# Altium PCB riglab_dynamic_scales_wifi_3ch .PcbDoc (part 1 of 3)
Units mm, origin at the board's own origin, x right, y up, seen from the top; angles counter-clockwise.
Board outline 130 x 80 mm, 4 copper layers (Top Layer, POWER, GND, Bottom Layer 1), stack 1.729 mm thick; 252 components, 202 nets, 899 pads, 104 vias.
Unrouted connection lines stored in the file: 235.
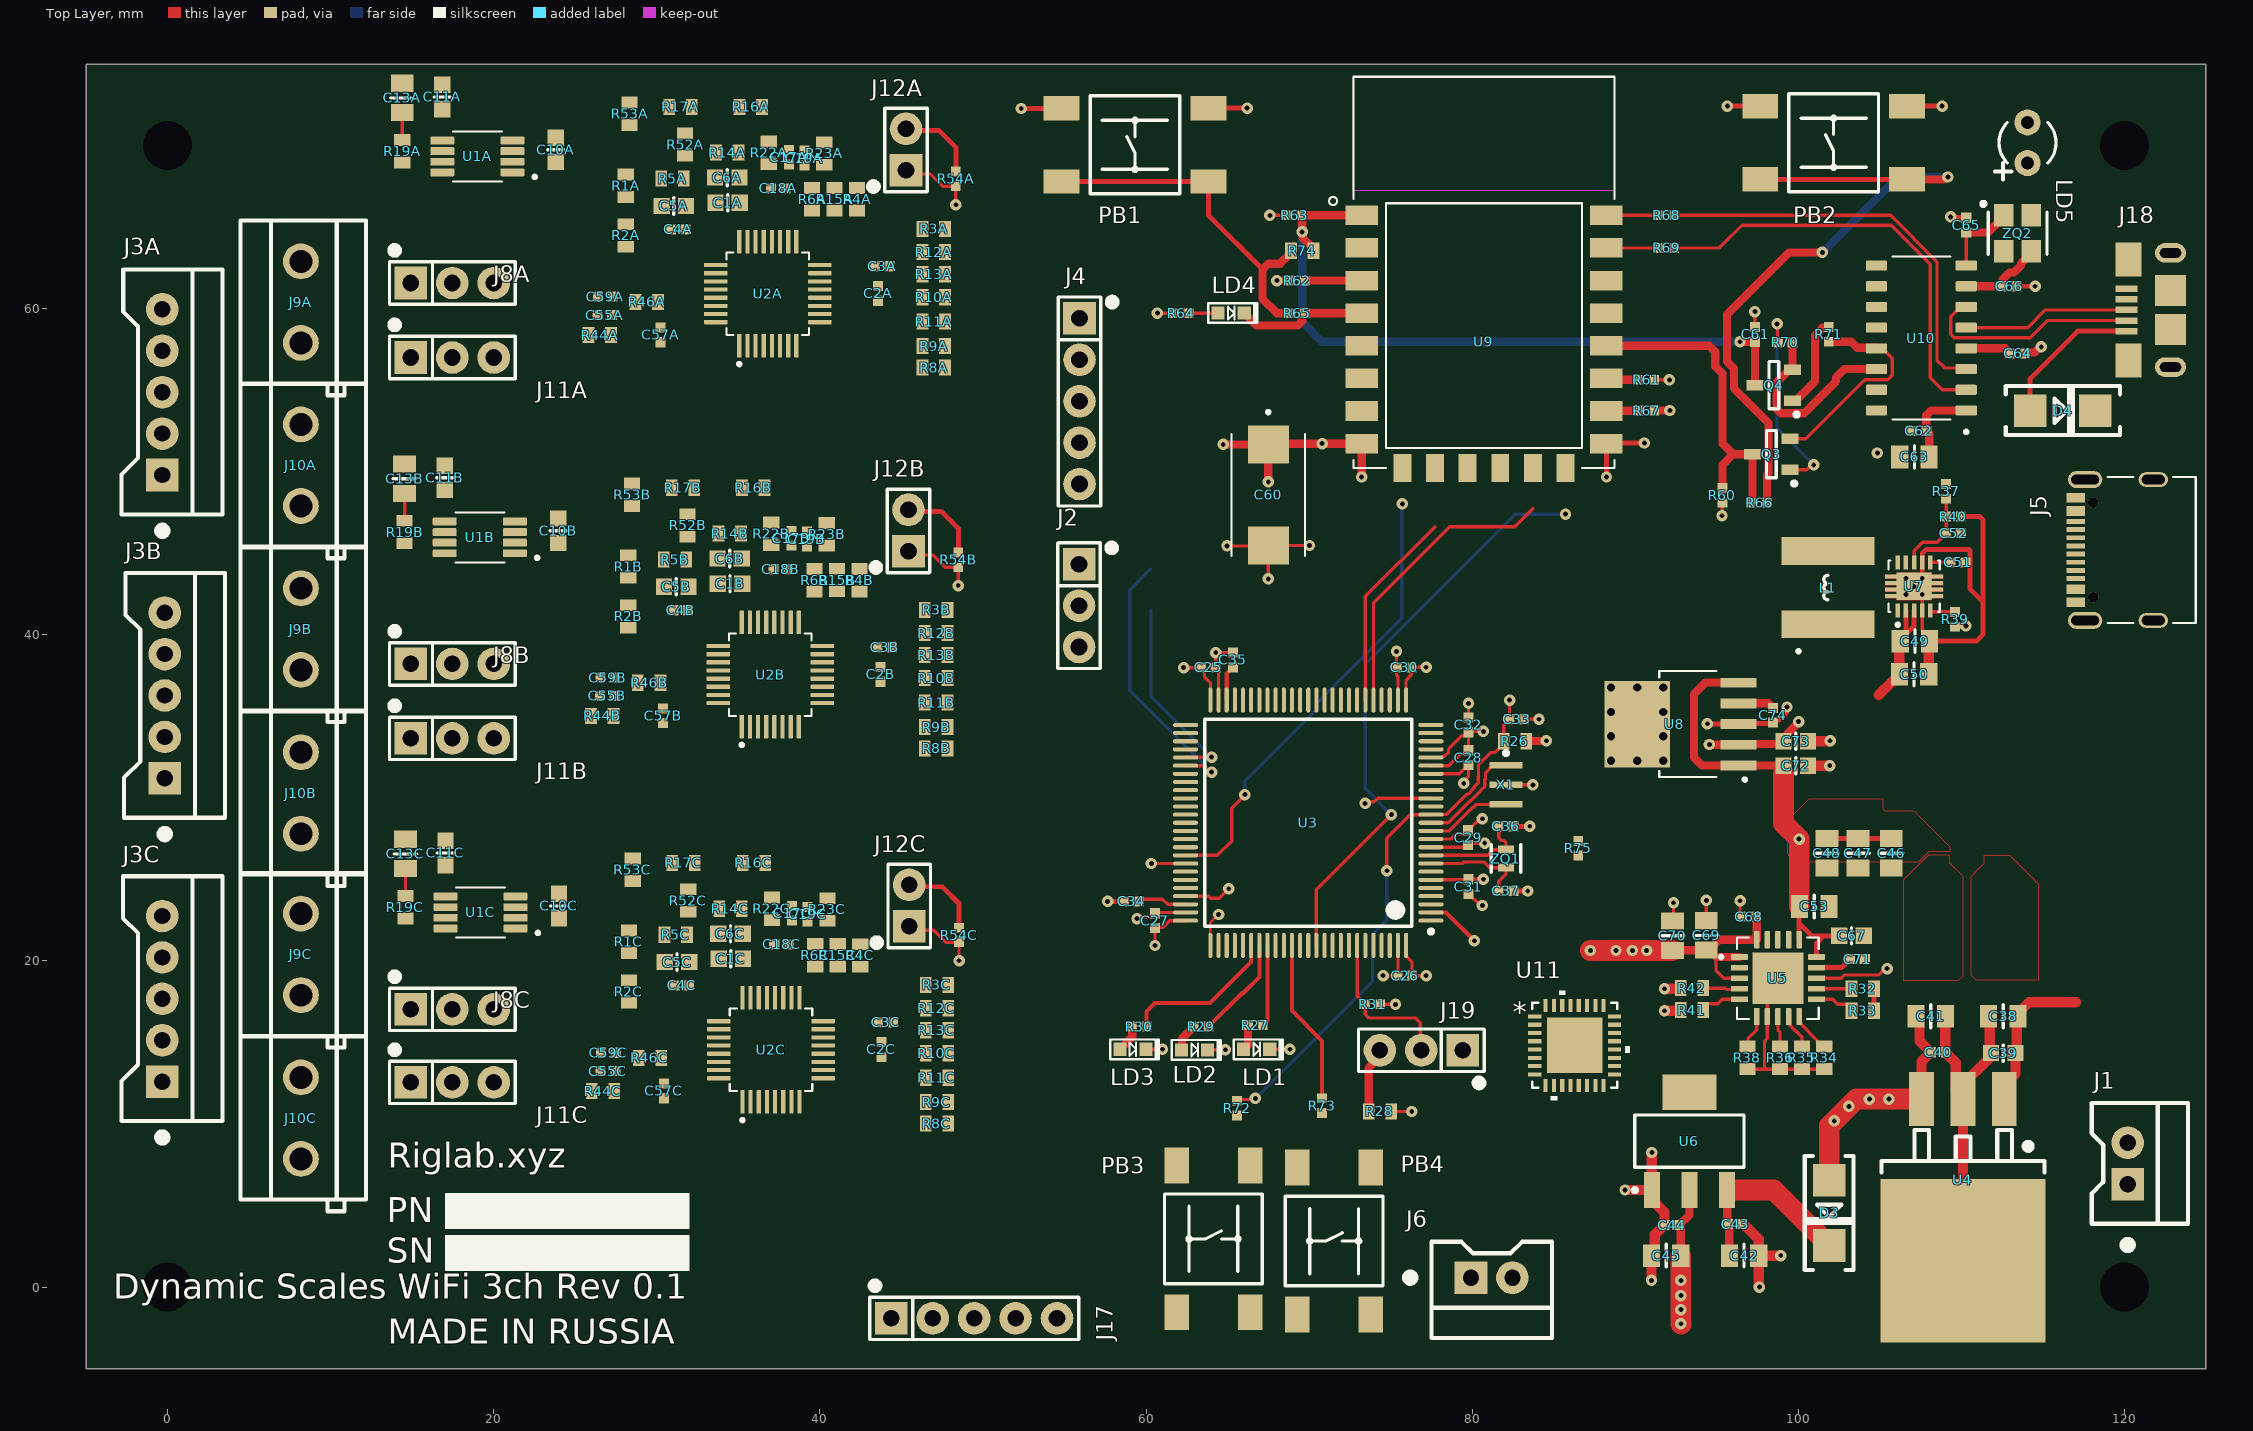
[diagram p0: Top Layer view]
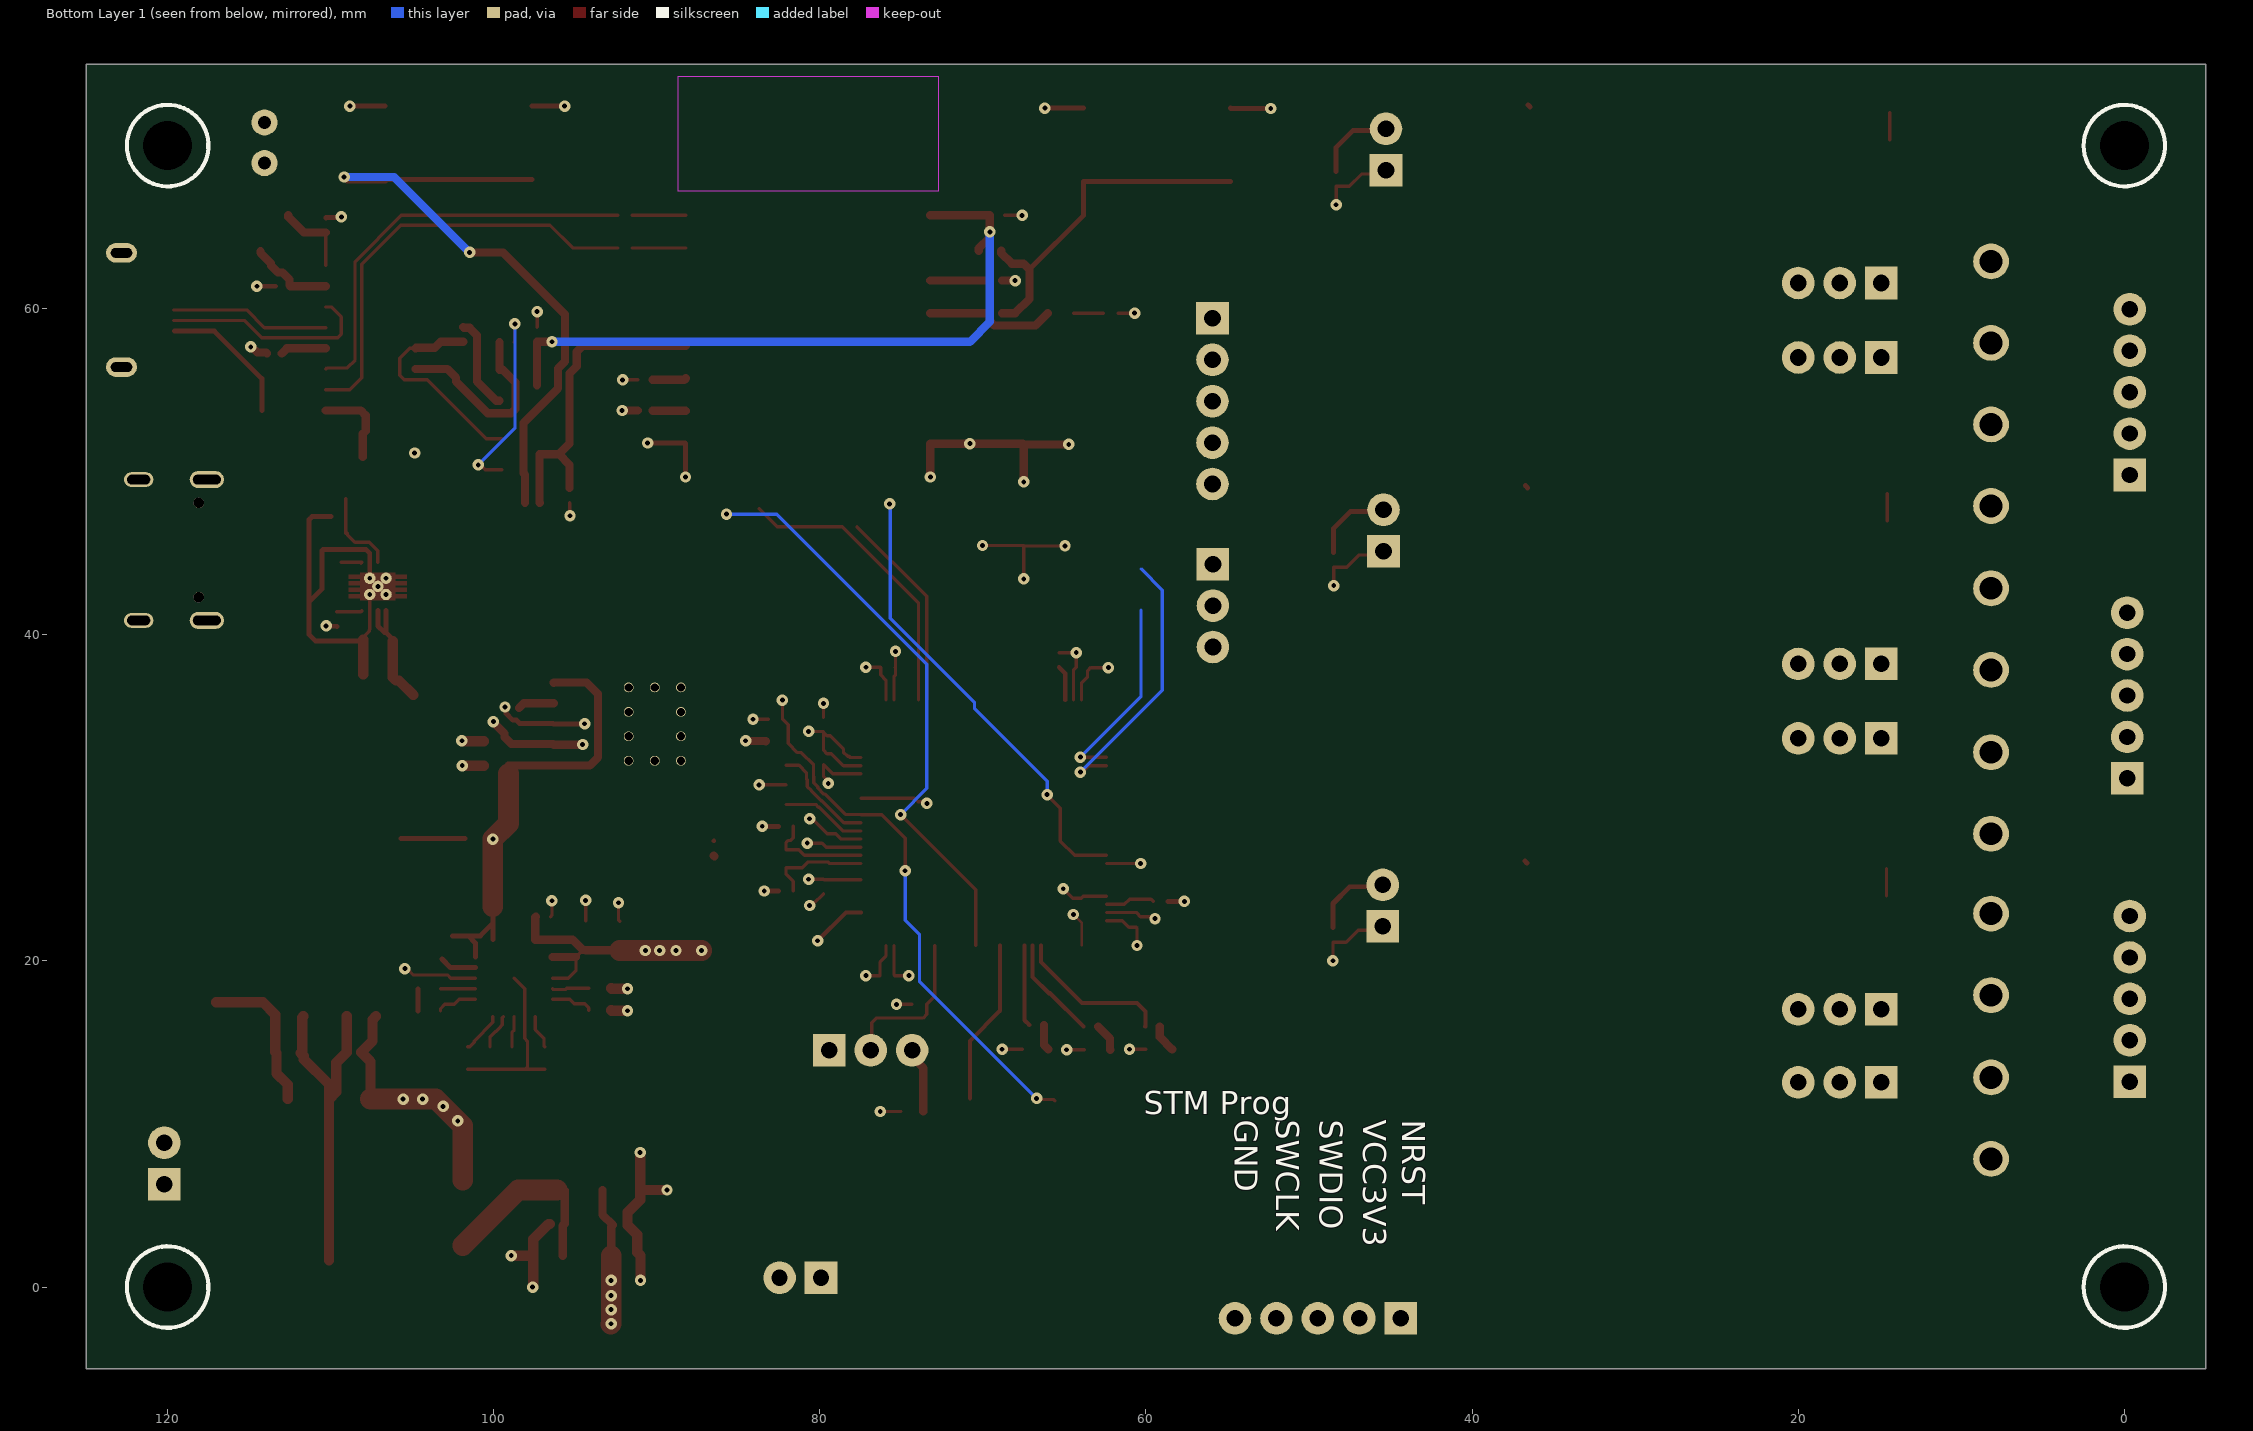
[diagram p1: Bottom Layer 1 view, seen from below]
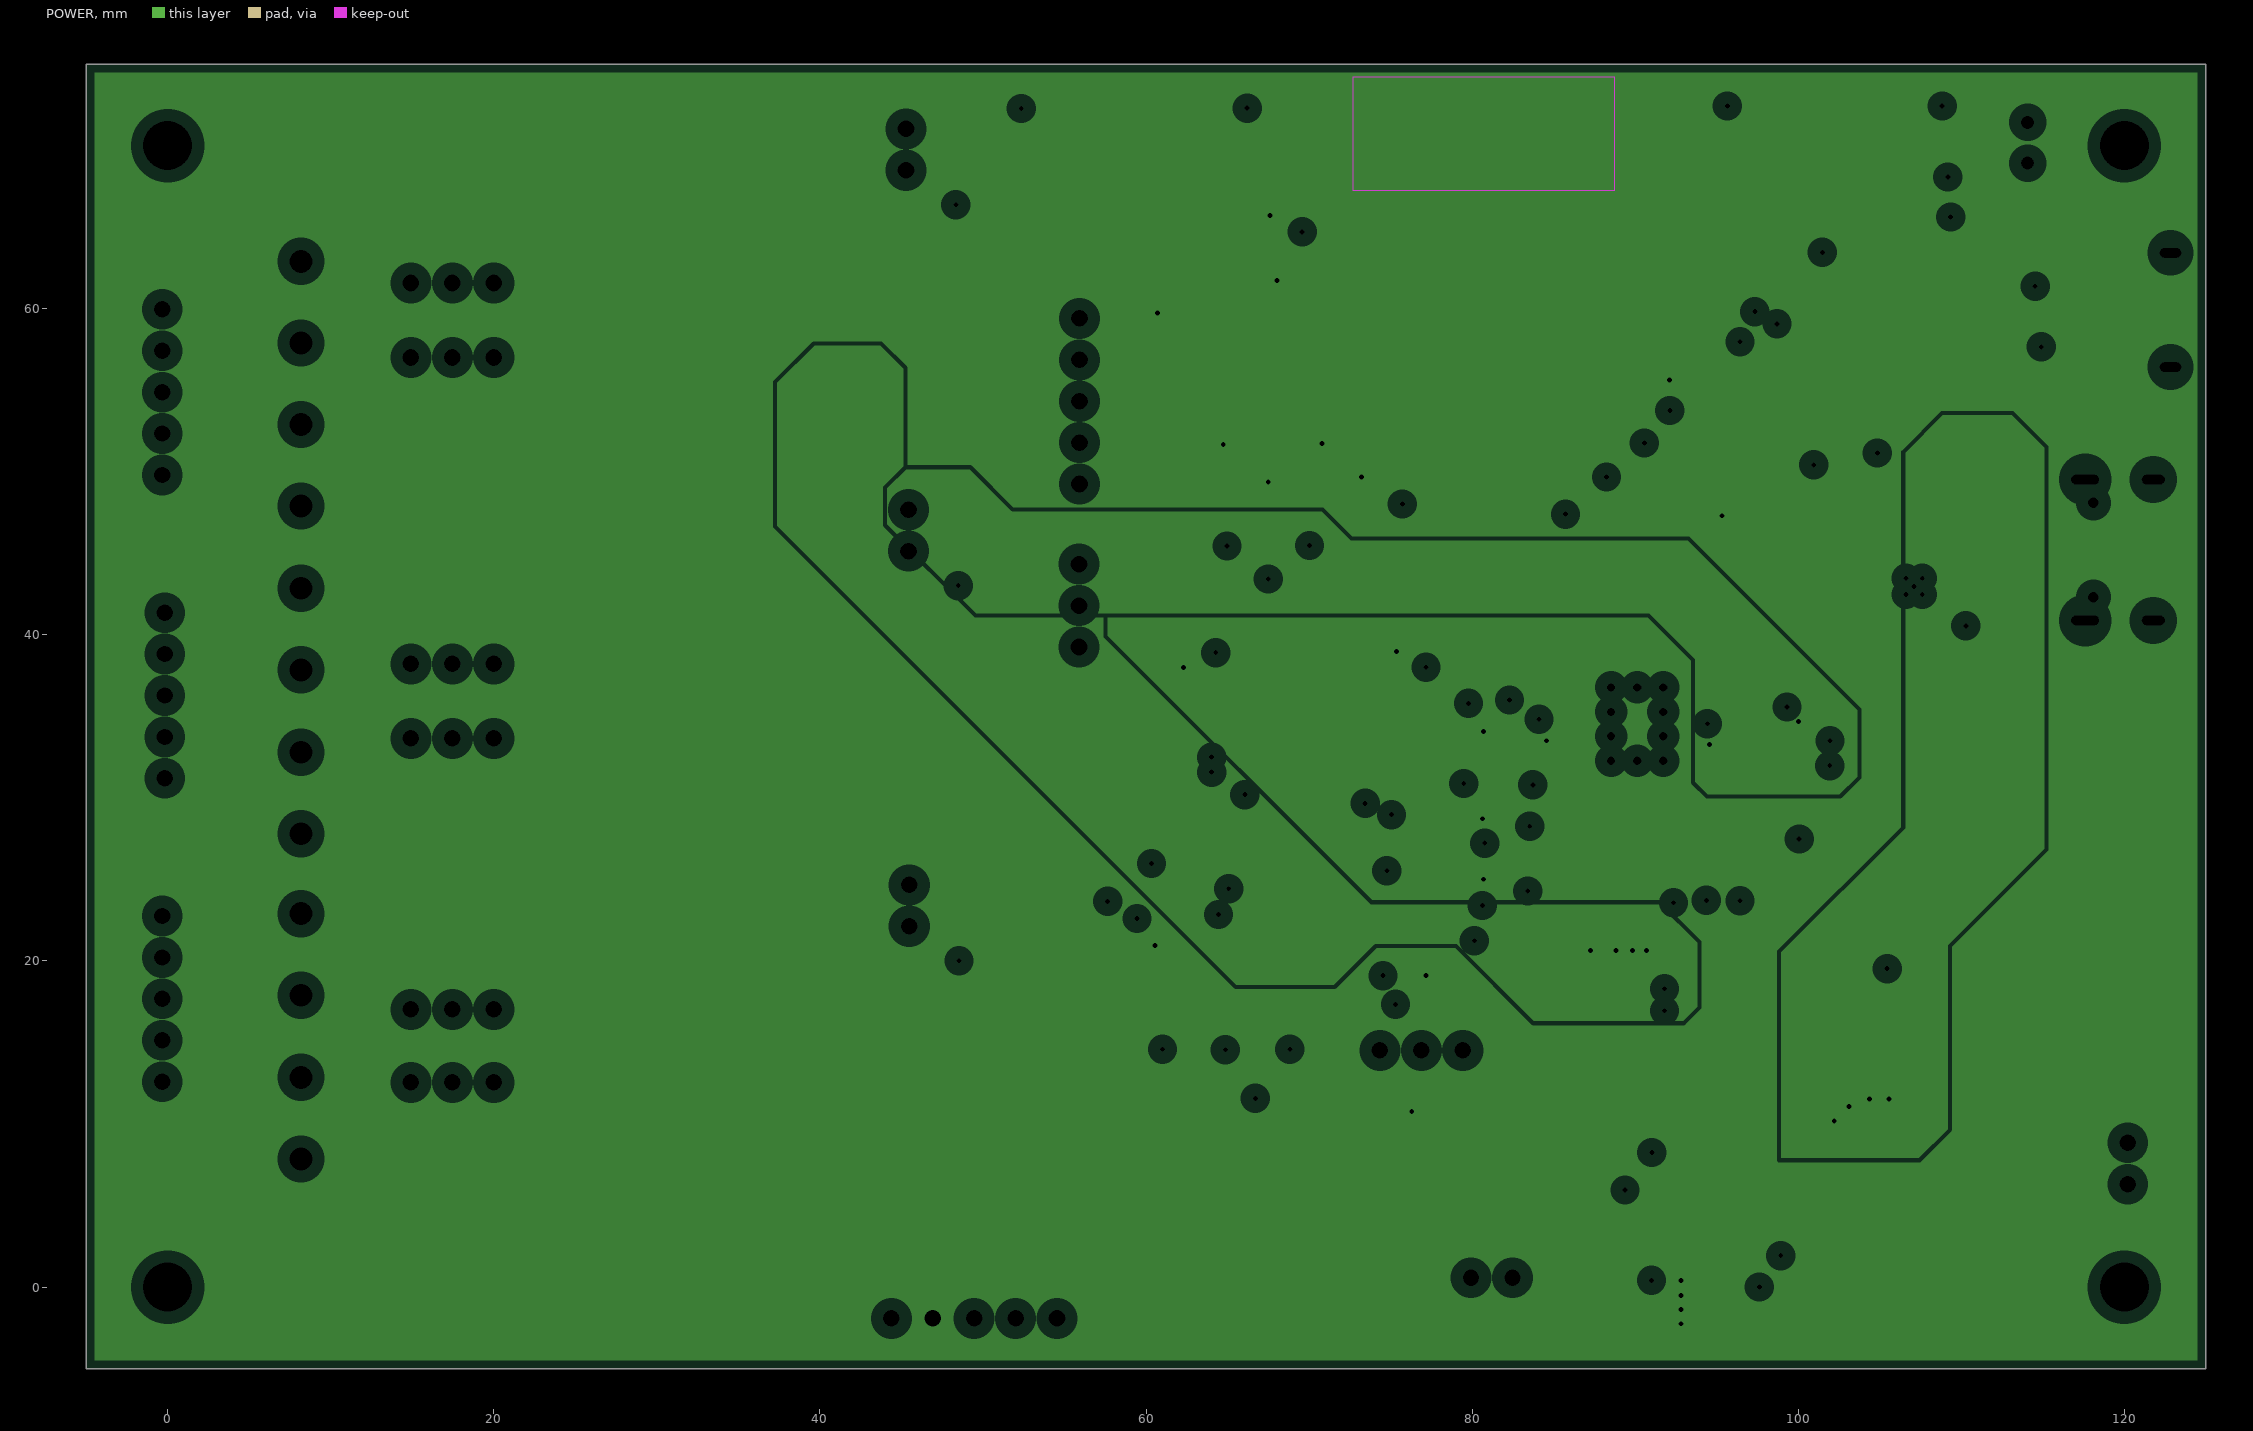
[diagram p2: POWER, clearances drawn from the general rule]
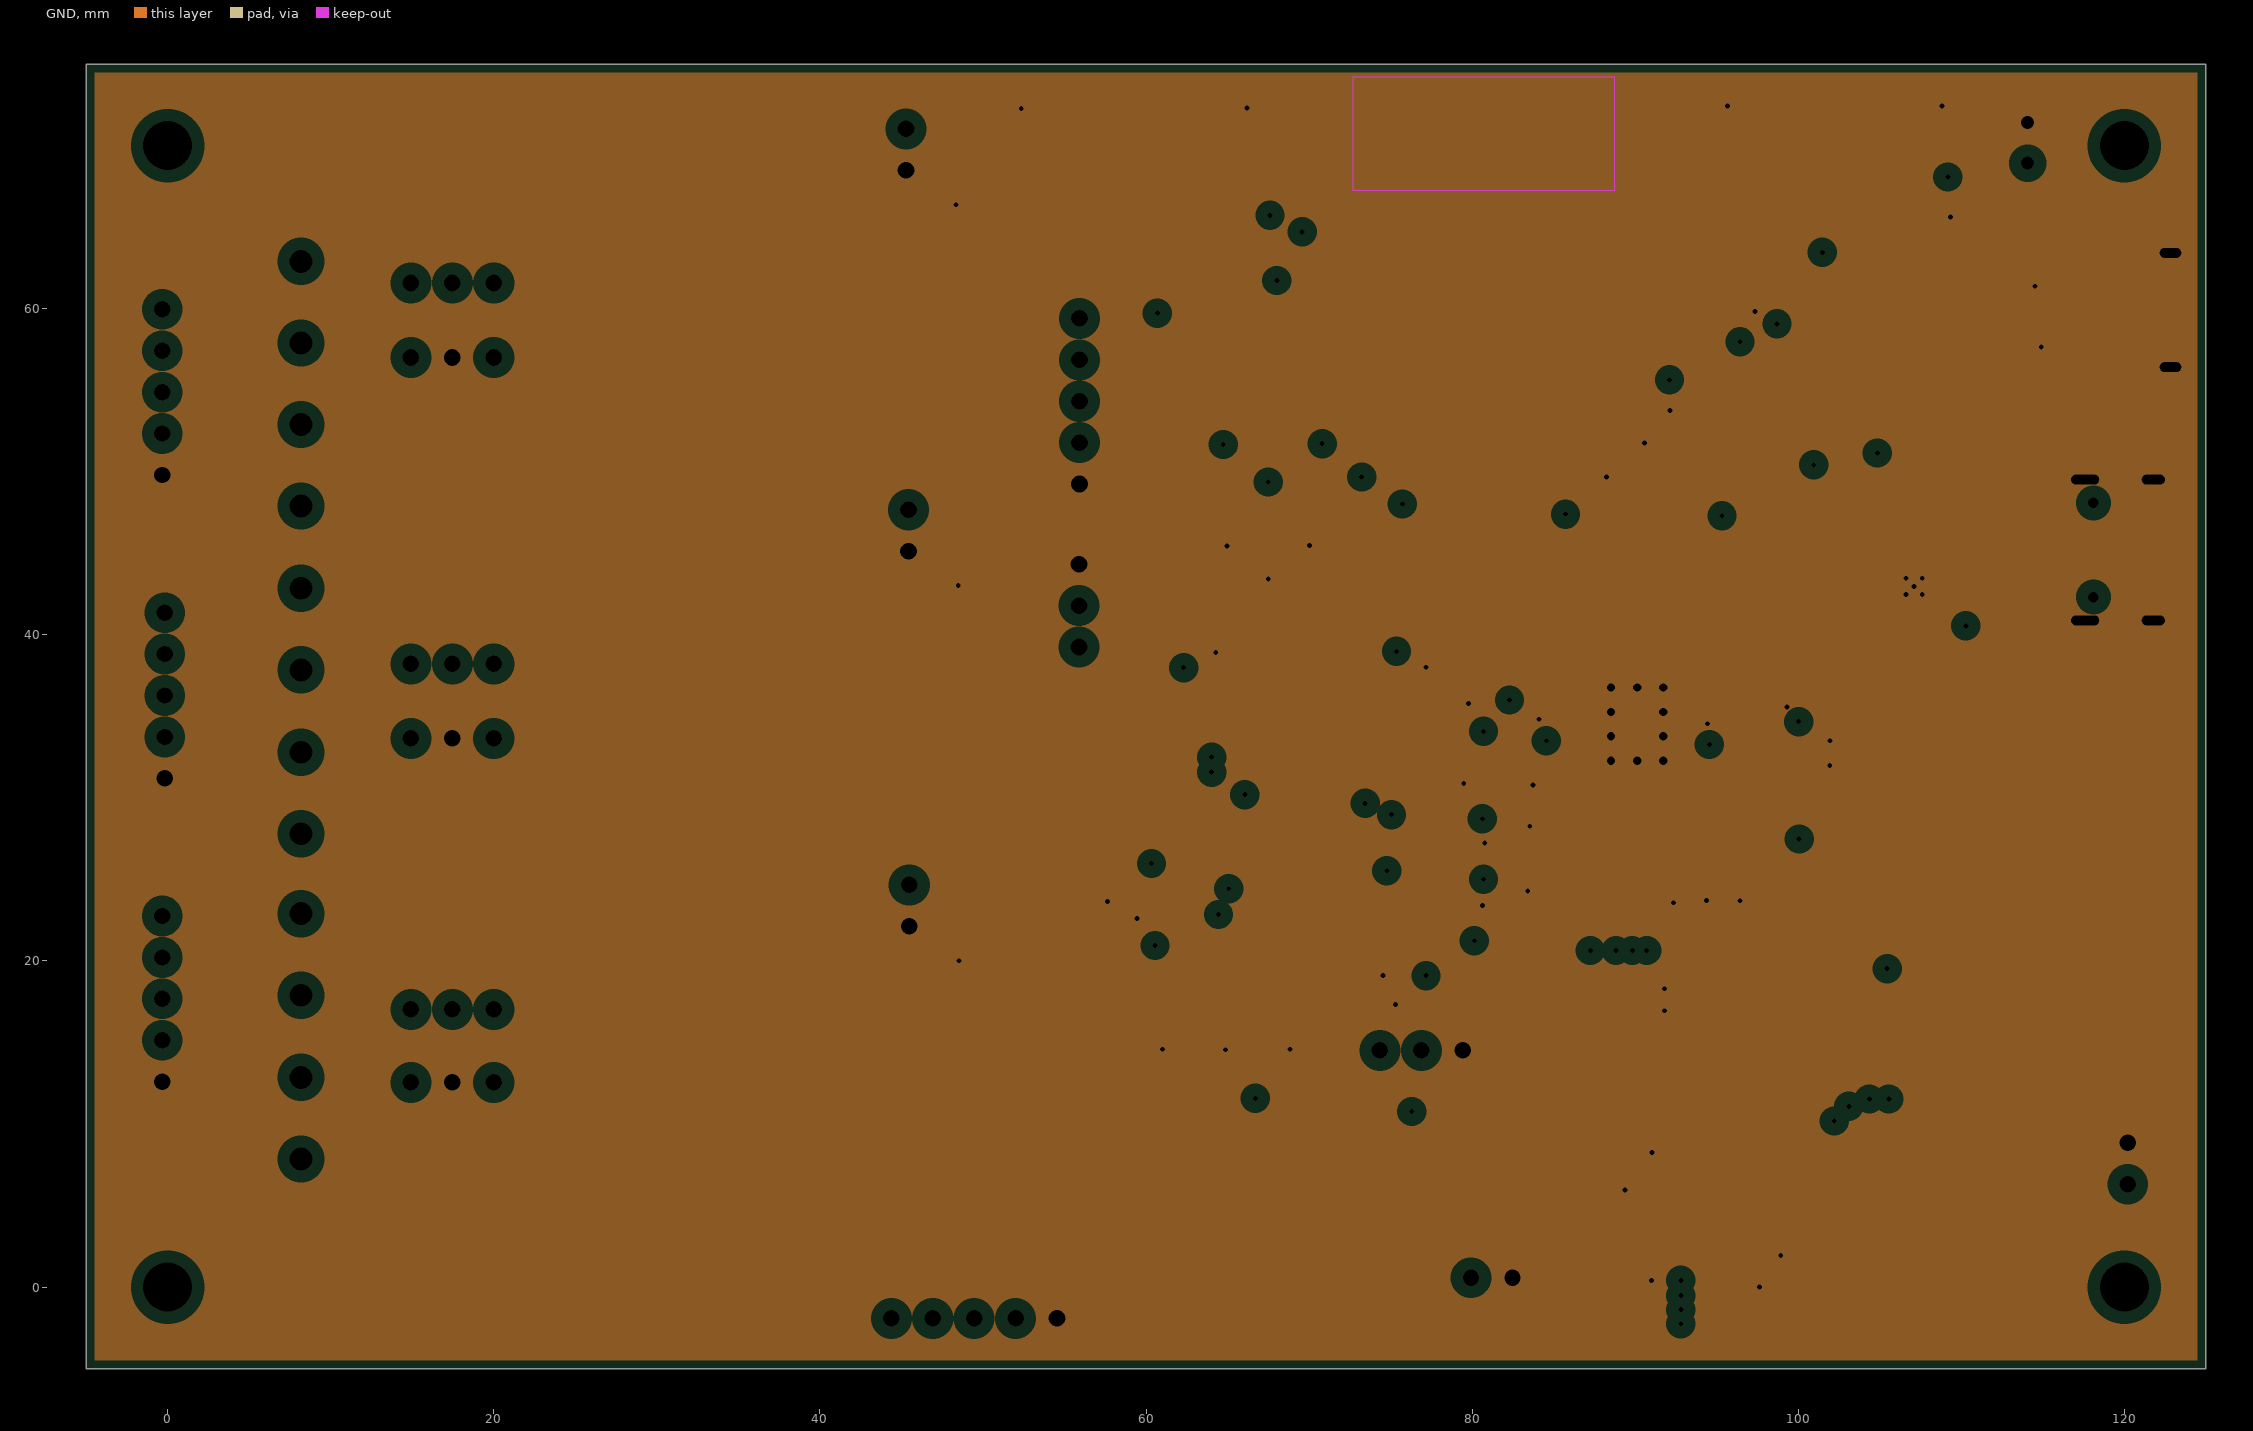
[diagram p3: GND, clearances drawn from the general rule]

## Layer stack, top to bottom
Top Solder: solder mask 0.0254, SM-001, Dk 4
Top Layer: signal copper 0.035
Dielectric 2: prepreg 0.0711, PP-006, Dk 4.1
POWER: plane copper 0.009, net (Multiple Nets)
Dielectric 1: core 1.4986, Core-043, Dk 4.3
GND: plane copper 0.009, net AGND
Dielectric 3: prepreg 0.0711, PP-006, Dk 4.1
Bottom Layer 1: signal copper 0.035
Bottom Solder: solder mask 0.0254, SM-001, Dk 4

## Board outline
-5,-5 -5,75 125,75 125,-5

## Design rules (kind name [scope] priority, off if disabled: settings)
BoardOutlineClearance [All] p1: gap=0.254 ignorepadtopadclearanceinfootprint=FALSE
Clearance All [All] p1: gap=0.2 ignorepadtopadclearanceinfootprint=TRUE except(0.25: Arc-Hole Track-Hole SMDPad-Hole THPad-Hole Via-Hole Fill-Hole Poly-Hole Region-Hole Text-Hole)
ComponentClearance ComponentClearance_1 [(InComponent('P1') OR InComponent('P2') OR InComponent('P3') OR InComponent('J1')) vs (InComponent('P1') OR InComponent('P2') OR InComponent('P3') OR InComponent('J1'))] p1: gap=0 collisioncheckmode=3 verticalgap=0 showdistances=FALSE
DiffPairsRouting [All] p1: maxlimit=0.254 minlimit=0.15 mostfreqgap=0.254 toplayer_minwidth=0.15 toplayer_maxwidth=0.381 toplayer_prefwidth=0.381 bottomlayer_minwidth=0.15 bottomlayer_maxwidth=0.381 bottomlayer_prefwidth=0.381 maxuncoupledlength=12.7
Height [All] p1: minheight=0 maxheight=40 prefheight=12.7
HoleSize [All] p1: absolutevalues=TRUE maxlimit=6 minlimit=0.2 maxpercent=80.000 minpercent=20.000
MinimumAnnularRing [All] p1: minimumring=0.2
MinimumSolderMaskSliver [All] p1: minsoldermaskwidth=0.099
PlaneClearance [All] p1: clearance=0.75
PlaneConnect PlaneConnect_1 [InNet('AGND')] p1: planeconnectstyle=Direct reliefexpansion=0.508 reliefentries=4 reliefconductorwidth=0.254 reliefairgap=0.2
PlaneConnect [All] p2: pad.planeconnectstyle=Relief pad.reliefexpansion=0.508 pad.reliefentries=4 pad.reliefconductorwidth=0.254 pad.reliefairgap=0.2 via.planeconnectstyle=Direct via.reliefexpansion=0.508 via.reliefentries=4 via.reliefconductorwidth=0.254 via.reliefairgap=0.2
PolygonConnect [All] p1: thpad.connectstyle=Relief thpad.reliefconductorwidth=0.254 thpad.reliefentries=4 thpad.polygonreliefangle="90 Angle" thpad.airgapwidth=0.254 smdpad.connectstyle=Relief smdpad.reliefconductorwidth=0.254 smdpad.reliefentries=4 smdpad.polygonreliefangle="90 Angle" smdpad.airgapwidth=0.254 via.connectstyle=Direct via.reliefconductorwidth=0.254 via.reliefentries=4 via.polygonreliefangle="90 Angle" via.airgapwidth=0.254
RoomDefinition Power [InComponentClass('Power')] p1: confinementstyle=ConfineIn formatcopy=TRUE lockcomponents=FALSE outline 77.9,-3.7 117.025,-3.7 117.025,53.849 77.9,53.849
RoomDefinition MCU [InComponentClass('MCU')] p2: confinementstyle=ConfineIn formatcopy=TRUE lockcomponents=FALSE outline 42.375,-4.775 125,-4.775 125,52.19 42.375,52.19
RoomDefinition ESP-WiFi [InComponentClass('ESP-WiFi')] p3: confinementstyle=ConfineIn formatcopy=TRUE lockcomponents=FALSE outline 53.25,43.775 125.675,43.775 125.675,74.775 53.25,74.775
RoomDefinition ADC2 [InComponentClass('ADC2')] p4: confinementstyle=ConfineIn formatcopy=TRUE lockcomponents=FALSE outline -4.154,0.995 50.121,0.995 50.121,31.82 -4.154,31.82
RoomDefinition ADC1 [InComponentClass('ADC1')] p5: confinementstyle=ConfineIn formatcopy=TRUE lockcomponents=FALSE outline -3.075,24 50.075,24 50.075,51.64 -3.075,51.64
RoomDefinition ADC0 [InComponentClass('ADC0')] p6: confinementstyle=ConfineIn formatcopy=TRUE lockcomponents=FALSE outline -4.4,44.35 49.925,44.35 49.925,75 -4.4,75
RoutingTopology [All] p1: topology=Daisy_Balanced
RoutingVias [All] p1: holewidth=0.3 width=0.7 viastyle="Through Hole" minholewidth=0.3 minwidth=0.7 maxholewidth=2 maxwidth=3
SilkToSilkClearance [All] p1: silktosilkclearance=0.15
SilkToSolderMaskClearance [IsPad] p1: minsilkscreentomaskgap=0.1 clearancetoexposedcopper=TRUE
SolderMaskExpansion [All] p1: expansion=0.05 istentingtop=FALSE
SupplyNets "Schematic Supply Nets_5" [InNet('GND')] p1: voltage=0.000
SupplyNets "Schematic Supply Nets_10" [InNet('VBUS')] p2: voltage=0.000
SupplyNets "Schematic Supply Nets_9" [InNet('VCC5V0')] p3: voltage=0.000
SupplyNets "Schematic Supply Nets_8" [InNet('VBAT')] p4: voltage=0.000
SupplyNets "Schematic Supply Nets_7" [InNet('VREF')] p5: voltage=0.000
SupplyNets "Schematic Supply Nets_6" [InNet('DVDD_3.3V')] p6: voltage=0.000
SupplyNets "Schematic Supply Nets_3" [InNet('AVDD_ADC')] p7: voltage=0.000
SupplyNets "Schematic Supply Nets_2" [InNet('VCC3V3')] p8: voltage=0.000
SupplyNets "Schematic Supply Nets_1" [InNet('VCC5V5_REG')] p9: voltage=0.000
SupplyNets "Schematic Supply Nets" [InNet('AVDD')] p10: voltage=0.000
Width [All] p1: maxlimit=4 minlimit=0.125 preferedwidth=0.254
20 further rules are at their usual default settings.

## Classes and differential pairs
component class Power: C38 C39 C40 C41 C42 C43 C44 C45 C46 C47 C48 C49 C50 C51 C52 C53 C67 C68 C69 C70 C71 C72 C73 C74 D3 L1 R32 R33 R34 R35 R36 R37 R38 R39 R40 R41 R42 U4 U5 U6 U7 U8
component class MCU: C25 C26 C27 C28 C29 C30 C31 C32 C33 C34 C35 C36 C37 J2 J5 J17 J19 LD1 LD2 LD3 LD5 PB3 PB4 R26 R27 R28 R29 R30 R31 R72 R73 R75 U3 U11 X1 ZQ1
component class ESP-WiFi: C60 C61 C62 C63 C64 C65 C66 D4 J4 LD4 PB1 PB2 Q3 Q4 R60 R61 R62 R63 R64 R65 R66 R67 R68 R69 R70 R71 R74 U9 U10 ZQ2
component class ADC2: C1C C2C C3C C4C C5C C6C C10C C11C C13C C17C C18C C19C C55C C57C C59C J3C J8C J9C J10C J11C J12C R1C R2C R3C R4C R5C R6C R8C R9C R10C R11C R12C R13C R14C R15C R16C R17C R19C R22C R23C R44C R46C R52C R53C R54C U1C U2C
component class ADC1: C1B C2B C3B C4B C5B C6B C10B C11B C13B C17B C18B C19B C55B C57B C59B J3B J8B J9B J10B J11B J12B R1B R2B R3B R4B R5B R6B R8B R9B R10B R11B R12B R13B R14B R15B R16B R17B R19B R22B R23B R44B R46B R52B R53B R54B U1B U2B
component class ADC0: C1A C2A C3A C4A C5A C6A C10A C11A C13A C17A C18A C19A C55A C57A C59A J3A J8A J9A J10A J11A J12A R1A R2A R3A R4A R5A R6A R8A R9A R10A R11A R12A R13A R14A R15A R16A R17A R19A R22A R23A R44A R46A R52A R53A R54A U1A U2A
channel class ADC: ADC0 ADC1 ADC2

## Components (designator, comment, footprint, x,y, rotation, side; value= is the part's Value field where it differs from the comment)
C1A "1u" CAPC1608X85N 34.344,66.494 r0 top (schematic designator C1)
C1B "1u" CAPC1608X85N 34.494,43.134 r0 top (schematic designator C1)
C1C "1u" CAPC1608X85N 34.54,20.129 r0 top (schematic designator C1)
C2A "0.1u" CAPC1005X55N 43.575,60.934 r90 top (schematic designator C2)
C2B "0.1u" CAPC1005X55N 43.725,37.574 r90 top (schematic designator C2)
C2C "0.1u" CAPC1005X55N 43.771,14.569 r90 top (schematic designator C2)
C3A "0.1u" CAPC1005X55N 43.83,62.6 r180 top (schematic designator C3)
C3B "0.1u" CAPC1005X55N 43.98,39.24 r180 top (schematic designator C3)
C3C "0.1u" CAPC1005X55N 44.026,16.235 r180 top (schematic designator C3)
C4A "0.1u" CAPC1005X55N 31.321,64.867 r0 top (schematic designator C4)
C4B "0.1u" CAPC1005X55N 31.471,41.507 r0 top (schematic designator C4)
C4C "0.1u" CAPC1005X55N 31.517,18.502 r0 top (schematic designator C4)
C5A "330n" CAPC1608X85N 31.044,66.298 r0 top (schematic designator C5)
C5B "330n" CAPC1608X85N 31.194,42.938 r0 top (schematic designator C5)
C5C "330n" CAPC1608X85N 31.24,19.933 r0 top (schematic designator C5)
C6A "330n" CAPC1608X85N 34.317,68.039 r0 top (schematic designator C6)
C6B "330n" CAPC1608X85N 34.467,44.679 r0 top (schematic designator C6)
C6C "330n" CAPC1608X85N 34.512,21.674 r0 top (schematic designator C6)
C10A "1u" CAPC1608X85N 23.803,69.739 r90 top (schematic designator C10)
C10B "1u" CAPC1608X85N 23.953,46.379 r90 top (schematic designator C10)
C10C "1u" CAPC1608X85N 23.999,23.374 r90 top (schematic designator C10)
C11A "1u" CAPC1608X85N 16.844,72.986 r90 top (schematic designator C11)
C11B "1u" CAPC1608X85N 16.994,49.626 r90 top (schematic designator C11)
C11C "1u" CAPC1608X85N 17.04,26.621 r90 top (schematic designator C11)
C13A "10uF" CAPC2012X135N 14.387,72.926 r270 top (schematic designator C13)
C13B "10uF" CAPC2012X135N 14.537,49.566 r270 top (schematic designator C13)
C13C "10uF" CAPC2012X135N 14.583,26.561 r270 top (schematic designator C13)
C17A "470p" CAPC1005X55N 38.104,69.284 r270 top (schematic designator C17)
C17B "470p" CAPC1005X55N 38.254,45.924 r270 top (schematic designator C17)
C17C "470p" CAPC1005X55N 38.3,22.919 r270 top (schematic designator C17)
C18A "4700pF" CAPC1005X55N 37.454,67.381 r180 top (schematic designator C18)
C18B "4700pF" CAPC1005X55N 37.604,44.021 r180 top (schematic designator C18)
C18C "4700pF" CAPC1005X55N 37.65,21.016 r180 top (schematic designator C18)
C19A "470p" CAPC1005X55N 39.054,69.234 r90 top (schematic designator C19)
C19B "470p" CAPC1005X55N 39.204,45.874 r90 top (schematic designator C19)
C19C "470p" CAPC1005X55N 39.25,22.869 r90 top (schematic designator C19)
C25 "100n" CAPC1005X55N 63.825,37.998 r180 top
C26 "100n" CAPC1005X55N 75.862,19.098 r0 top
C27 "100n" CAPC1005X55N 60.55,22.473 r270 top
C28 "100n" CAPC1005X55N 79.775,32.473 r90 top
C29 "100n" CAPC1005X55N 79.754,27.562 r90 top
C30 "100n" CAPC1005X55N 75.825,37.998 r180 top
C31 "100n" CAPC1005X55N 79.774,24.562 r90 top
C32 "100n" CAPC1005X55N 79.775,34.473 r270 top
C33 "100n" CAPC1005X55N 82.725,34.823 r180 top
C34 "2.2uF" CAPC1005X55N 59.1,23.652 r0 top
C35 "2.2uF" CAPC1005X55N 65.325,38.458 r270 top
C36 "12pF" CAPC1005X55N 82.075,28.258 r180 top
C37 "12pF" CAPC1005X55N 82.075,24.29 r180 top
C38 "22uF" CAPC2012X135N 112.575,16.61 r0 top
C39 "1u" CAPC1608X85N 112.575,14.35 r0 top
C40 "100n" CAPC1005X55N 108.575,14.4 r180 top
C41 "22uF" CAPC2012X135N 108.125,16.609 r180 top
C42 "22uF" CAPC2012X135N 96.675,1.925 r180 top
C43 "100n" CAPC1005X55N 96.125,3.866 r180 top
C44 "100n" CAPC1005X55N 92.245,3.8 r0 top
C45 "22uF" CAPC2012X135N 91.898,1.925 r0 top
C46 "22uF" CAPC2012X135N 105.7,26.609 r90 top
C47 "22uF" CAPC2012X135N 103.658,26.609 r90 top
C48 "22uF" CAPC2012X135N 101.759,26.609 r90 top
C49 "10u" CAPC2012X135N 107.157,39.609 r180 top
C50 "10u" CAPC2012X135N 107.104,37.58 r180 top
C51 "100n" CAPC1005X55N 109.794,44.445 r180 top
C52 "10pF" CAPC1005X55N 109.516,46.233 r180 top
C53 "22uF" CAPC2012X135N 100.98,23.342 r180 top
C55A "470p" CAPC1005X55N 26.81,59.611 r0 top (schematic designator C55)
C55B "470p" CAPC1005X55N 26.96,36.251 r0 top (schematic designator C55)
C55C "470p" CAPC1005X55N 27.006,13.246 r0 top (schematic designator C55)
C57A "4700pF" CAPC1005X55N 30.234,58.391 r270 top (schematic designator C57)
C57B "4700pF" CAPC1005X55N 30.384,35.031 r270 top (schematic designator C57)
C57C "4700pF" CAPC1005X55N 30.43,12.026 r270 top (schematic designator C57)
C59A "470p" CAPC1005X55N 26.835,60.738 r180 top (schematic designator C59)
C59B "470p" CAPC1005X55N 26.985,37.378 r180 top (schematic designator C59)
C59C "470p" CAPC1005X55N 27.031,14.373 r180 top (schematic designator C59)
C60 "10uF" CAPPM7343X310N 67.5,48.575 r270 top
C61 "100n" CAPC1005X55N 97.35,58.42 r270 top
C62 "100n" CAPC1005X55N 107.4,52.5 r180 top
C63 "10u" CAPC2012X135N 107.125,50.91 r180 top
C64 "100n" CAPC1005X55N 113.45,57.255 r180 top
C65 "18p" CAPC1005X55N 110.3,65.125 r270 top
C66 "18p" CAPC1005X55N 112.925,61.375 r180 top
C67 "1u" CAPC1608X85N 103.267,21.542 r180 top
C68 "100n" CAPC1005X55N 96.965,22.717 r0 top
C69 "22uF" CAPC2012X135N 94.355,21.567 r270 top
C70 "22uF" CAPC2012X135N 92.28,21.542 r270 top
C71 "0.01uF" CAPC1005X55N 103.625,20.114 r180 top
C72 "1u" CAPC1608X85N 99.85,31.975 r180 top
C73 "1u" CAPC1608X85N 99.85,33.475 r180 top
C74 "1nF" CAPC1005X55N 98.45,35.063 r90 top
D3 "SMA4007" DO-214AC 101.9,4.55 r270 top value=1000V
D4 "SMA4007" DO-214AC 116.225,53.75 r0 top value=1000V
J1 "ZX-XH2.54-2PZZ" XH2.54-2PZZ 120.2,7.58 r90 top
J2 "DS1021-1*3SF11-B" PLS-3 55.895,44.331 r270 top
J3A "ZX-XH2.54-5PZZ" XH2.54-5PZZ -0.325,54.88 r90 top locked (schematic designator J3)
J3B "ZX-XH2.54-5PZZ" XH2.54-5PZZ -0.175,36.277 r90 top locked (schematic designator J3)
J3C "ZX-XH2.54-5PZZ" XH2.54-5PZZ -0.325,17.675 r90 top locked (schematic designator J3)
J4 "DS1021-1*5SF11-B" PLS-5 55.925,59.405 r270 top
J5 "USB-TYPE-C-019" AMPHENOL_12402012E212A 121.775,45.2 r90 top
J6 "ZX-XH2.54-2PZZ" XH2.54-2PZZ 81.2,0.575 r0 top
J8A "DS1021-1*3SF11-B" PLS-3 14.921,61.574 r0 top (schematic designator J8)
J8B "DS1021-1*3SF11-B" PLS-3 14.921,38.214 r0 top (schematic designator J8)
J8C "DS1021-1*3SF11-B" PLS-3 14.921,17.031 r0 top (schematic designator J8)
J9A "KF301-5.0-2P" CONN-TH_P5.00_KF301-5.0-2P 8.175,60.4 r270 top locked (schematic designator J9)
J9B "KF301-5.0-2P" CONN-TH_P5.00_KF301-5.0-2P 8.175,40.351 r270 top locked (schematic designator J9)
J9C "KF301-5.0-2P" CONN-TH_P5.00_KF301-5.0-2P 8.175,20.4 r270 top locked (schematic designator J9)
J10A "KF301-5.0-2P" CONN-TH_P5.00_KF301-5.0-2P 8.175,50.4 r270 top locked (schematic designator J10)
J10B "KF301-5.0-2P" CONN-TH_P5.00_KF301-5.0-2P 8.175,30.297 r270 top locked (schematic designator J10)
J10C "KF301-5.0-2P" CONN-TH_P5.00_KF301-5.0-2P 8.175,10.36 r270 top locked (schematic designator J10)
J11A "DS1021-1*3SF11-B" PLS-3 14.921,57.006 r0 top (schematic designator J11)
J11B "DS1021-1*3SF11-B" PLS-3 14.921,33.646 r0 top (schematic designator J11)
J11C "DS1021-1*3SF11-B" PLS-3 14.921,12.551 r0 top (schematic designator J11)
J12A "DS1021-1*2SF11-B" PLS-2 46.584,67.09 r90 top (schematic designator J12)
J12B "DS1021-1*2SF11-B" PLS-2 46.734,43.73 r90 top (schematic designator J12)
J12C "DS1021-1*2SF11-B" PLS-2 46.78,20.725 r90 top (schematic designator J12)
J17 "DS1021-1*5SF11-B" PLS-5 44.381,-1.919 r0 top
J18 "U254-051T-4BH81-S1S" U254-051T-4BH81-S1S 120.128,59.92 r90 top
J19 "DS1021-1*3SF11-B" PLS-3 79.425,14.519 r180 top
L1 "1uH" APSWPA6045 101.814,42.895 r90 top
LD1 "Blue" 0603(LED_B) 65.99,14.583 r0 top value=LTST-C191TBKT-5A
LD2 "Blue" 0603(LED_B) 62.184,14.551 r0 top value=LTST-C191TBKT-5A
LD3 "Blue" 0603(LED_B) 58.399,14.583 r0 top value=LTST-C191TBKT-5A
LD4 "Blue" 0603(LED) 64.425,59.725 r0 top value=TO-1608BC-BF
LD5 "Green" LD-3mm-G 114.06,70.175 r90 top
PB1 "FSM6JSMATR" FSMxJSMA-Series 59.325,70.05 r90 top
PB2 "FSM6JSMATR" FSMxJSMA-Series 102.167,70.175 r90 top
PB3 "FSM6JSMATR" FSMxJSMA-Series 64.134,2.953 r0 top
PB4 "FSM6JSMATR" FSMxJSMA-Series 71.538,2.823 r0 top
Q3 "BC847" SOT95P240X130-3N 98.35,51.075 r180 top
Q4 "BC847" SOT95P240X130-3N 98.5,55.312 r180 top
R1A "0" RESC1608X50N 28.098,67.544 r90 top (schematic designator R1)
R1B "0" RESC1608X50N 28.248,44.184 r90 top (schematic designator R1)
R1C "0" RESC1608X50N 28.294,21.179 r90 top (schematic designator R1)
R2A "0" RESC1608X50N 28.098,64.49 r90 top (schematic designator R2)
R2B "0" RESC1608X50N 28.248,41.13 r90 top (schematic designator R2)
R2C "0" RESC1608X50N 28.294,18.125 r90 top (schematic designator R2)
R3A "0" RESC1608X50N 46.98,64.89 r0 top (schematic designator R3)
R3B "0" RESC1608X50N 47.13,41.53 r0 top (schematic designator R3)
R3C "0" RESC1608X50N 47.175,18.525 r0 top (schematic designator R3)
R4A "0" RESC1608X50N 42.279,66.704 r90 top (schematic designator R4)
R4B "0" RESC1608X50N 42.429,43.344 r90 top (schematic designator R4)
R4C "0" RESC1608X50N 42.475,20.339 r90 top (schematic designator R4)
R5A "0" RESC1608X50N 30.959,67.973 r180 top (schematic designator R5)
R5B "0" RESC1608X50N 31.109,44.613 r180 top (schematic designator R5)
R5C "0" RESC1608X50N 31.155,21.608 r180 top (schematic designator R5)
R6A "24" RESC1608X50N 39.525,66.712 r270 top (schematic designator R6)
R6B "24" RESC1608X50N 39.675,43.352 r270 top (schematic designator R6)
R6C "24" RESC1608X50N 39.72,20.347 r270 top (schematic designator R6)
R8A "24" RESC1608X50N 46.98,56.39 r180 top (schematic designator R8)
R8B "24" RESC1608X50N 47.13,33.03 r180 top (schematic designator R8)
R8C "24" RESC1608X50N 47.175,10.025 r180 top (schematic designator R8)
R9A "24" RESC1608X50N 46.98,57.705 r180 top (schematic designator R9)
R9B "24" RESC1608X50N 47.13,34.345 r180 top (schematic designator R9)
R9C "24" RESC1608X50N 47.175,11.34 r180 top (schematic designator R9)
R10A "24" RESC1608X50N 46.98,60.705 r180 top (schematic designator R10)
R10B "24" RESC1608X50N 47.13,37.345 r180 top (schematic designator R10)
R10C "24" RESC1608X50N 47.175,14.34 r180 top (schematic designator R10)
R11A "24" RESC1608X50N 46.98,59.205 r180 top (schematic designator R11)
R11B "24" RESC1608X50N 47.13,35.845 r180 top (schematic designator R11)
R11C "24" RESC1608X50N 47.175,12.84 r180 top (schematic designator R11)
R12A "24" RESC1608X50N 46.98,63.468 r0 top (schematic designator R12)
R12B "24" RESC1608X50N 47.13,40.108 r0 top (schematic designator R12)
R12C "24" RESC1608X50N 47.175,17.103 r0 top (schematic designator R12)
R13A "24" RESC1608X50N 46.98,62.115 r180 top (schematic designator R13)
R13B "24" RESC1608X50N 47.13,38.755 r180 top (schematic designator R13)
R13C "24" RESC1608X50N 47.175,15.75 r180 top (schematic designator R13)
R14A "0" RESC1608X50N 34.317,69.569 r180 top (schematic designator R14)
R14B "0" RESC1608X50N 34.467,46.209 r180 top (schematic designator R14)
R14C "0" RESC1608X50N 34.512,23.204 r180 top (schematic designator R14)
R15A "24" RESC1608X50N 40.902,66.717 r270 top (schematic designator R15)
R15B "24" RESC1608X50N 41.052,43.357 r270 top (schematic designator R15)
R15C "24" RESC1608X50N 41.098,20.352 r270 top (schematic designator R15)
R16A "0" RESC1608X50N 35.758,72.375 r0 top (schematic designator R16)
R16B "0" RESC1608X50N 35.907,49.015 r0 top (schematic designator R16)
R16C "0" RESC1608X50N 35.953,26.01 r0 top (schematic designator R16)
R17A "0" RESC1608X50N 31.449,72.375 r0 top (schematic designator R17)
R17B "0" RESC1608X50N 31.599,49.015 r0 top (schematic designator R17)
R17C "0" RESC1608X50N 31.645,26.01 r0 top (schematic designator R17)
R19A "3 Ohm" RESC1608X50N 14.387,69.661 r270 top (schematic designator R19)
R19B "3 Ohm" RESC1608X50N 14.537,46.301 r270 top (schematic designator R19)
R19C "3 Ohm" RESC1608X50N 14.583,23.296 r270 top (schematic designator R19)
R22A "4.12k" RESC1608X50N 36.866,69.561 r270 top (schematic designator R22)
R22B "4.12k" RESC1608X50N 37.016,46.201 r270 top (schematic designator R22)
R22C "4.12k" RESC1608X50N 37.062,23.196 r270 top (schematic designator R22)
R23A "4.12k" RESC1608X50N 40.269,69.522 r270 top (schematic designator R23)
R23B "4.12k" RESC1608X50N 40.419,46.162 r270 top (schematic designator R23)
R23C "4.12k" RESC1608X50N 40.465,23.157 r270 top (schematic designator R23)
R26 "4.7k" RESC1608X50N 82.625,33.473 r0 top
R27 "499" RESC1005X40N 66.706,16.069 r180 top
R28 "4.7k" RESC1608X50N 74.345,10.769 r0 top
R29 "499" RESC1005X40N 63.384,15.976 r180 top
R30 "499" RESC1005X40N 59.599,15.976 r180 top
R31 "100k" RESC1005X40N 73.9,17.348 r180 top
R32 "0" RESC1608X50N 103.955,18.292 r180 top
R33 "0" RESC1608X50N 103.955,16.942 r180 top
R34 "0" RESC1608X50N 101.598,14.057 r90 top
R35 "0" RESC1608X50N 100.225,14.057 r90 top
R36 "0" RESC1608X50N 98.882,14.057 r90 top
R37 "698k" RESC1005X40N 109.066,48.8 r90 top
R38 "0" RESC1608X50N 96.877,14.057 r90 top
R39 "100k" RESC1005X40N 109.618,40.95 r270 top
R40 "69.8k" RESC1005X40N 109.516,47.25 r180 top
R41 "0" RESC1608X50N 93.48,16.982 r0 top
R42 "0" RESC1608X50N 93.48,18.33 r0 top
R44A "4.12k" RESC1608X50N 26.505,58.382 r0 top (schematic designator R44)
R44B "4.12k" RESC1608X50N 26.655,35.022 r0 top (schematic designator R44)
R44C "4.12k" RESC1608X50N 26.701,12.017 r0 top (schematic designator R44)
R46A "0" RESC1608X50N 29.379,60.418 r0 top (schematic designator R46)
R46B "0" RESC1608X50N 29.529,37.058 r0 top (schematic designator R46)
R46C "0" RESC1608X50N 29.575,14.052 r0 top (schematic designator R46)
R52A "1.2M" RESC1608X50N 31.736,70.068 r90 top (schematic designator R52)
R52B "1.2M" RESC1608X50N 31.886,46.708 r90 top (schematic designator R52)
R52C "1.2M" RESC1608X50N 31.932,23.703 r90 top (schematic designator R52)
R53A "1.2M" RESC1608X50N 28.329,71.95 r90 top (schematic designator R53)
R53B "1.2M" RESC1608X50N 28.479,48.59 r90 top (schematic designator R53)
R53C "1.2M" RESC1608X50N 28.525,25.585 r90 top (schematic designator R53)
R54A "392k" RESC1005X40N 48.339,67.955 r90 top (schematic designator R54)
R54B "392k" RESC1005X40N 48.489,44.595 r90 top (schematic designator R54)
R54C "392k" RESC1005X40N 48.535,21.59 r90 top (schematic designator R54)
R60 "10k" RESC1005X40N 95.35,48.55 r90 top
R61 "10k" RESC1005X40N 90.713,55.637 r180 top
R62 "10k" RESC1005X40N 69.275,61.725 r0 top
R63 "10k" RESC1005X40N 69.125,65.725 r0 top
R64 "499" RESC1005X40N 62.155,59.725 r180 top
R65 "499" RESC1005X40N 69.275,59.725 r180 top
R66 "499" RESC1005X40N 97.637,48.1 r180 top
R67 "10k" RESC1005X40N 90.713,53.755 r180 top
R68 "499" RESC1005X40N 91.95,65.725 r180 top
R69 "499" RESC1005X40N 91.95,63.725 r180 top
R70 "10k" RESC1005X40N 99.2,57.933 r180 top
R71 "10k" RESC1005X40N 101.867,58.42 r90 top
R72 "499" RESC1005X40N 65.583,10.975 r90 top
R73 "499" RESC1005X40N 70.8,11.125 r90 top
R74 "0" RESC1608X50N 69.575,63.555 r180 top
R75 "499" RESC1005X40N 86.509,26.909 r270 top
U1A "REF5025AIDGKR" SOP65P490X110-8N_2 18.994,69.336 r180 top (schematic designator U1)
U1B "REF5025AIDGKR" SOP65P490X110-8N_2 19.144,45.976 r180 top (schematic designator U1)
U1C "REF5025AIDGKR" SOP65P490X110-8N_2 19.19,22.971 r180 top (schematic designator U1)
U2A "ADS124S08IPBSR" QFP50P700X700X120-32N 36.808,60.921 r90 top (schematic designator U2)
U2B "ADS124S08IPBSR" QFP50P700X700X120-32N 36.958,37.561 r90 top (schematic designator U2)
U2C "ADS124S08IPBSR" QFP50P700X700X120-32N 37.003,14.556 r90 top (schematic designator U2)
U3 "STM32F765VGT6" LQFP100_L 69.95,28.473 r180 top value=100-LQFP
U4 "LM7805S" TO-263-3_L8.6-W10.2-P2.54-LS14.4-BR 110.1,6.577 r90 top value=TO-263-3
U5 "TPS7A4700RGWR" QFN65P500X500X100-21N 98.755,18.942 r0 top
U6 "AMS1117-3.3" SOT230P700-4BN 93.325,8.95 r90 top
U7 "TPS63060DSCR" WSON10 107.104,42.97 r90 top value="WSON (10)"
U8 "TPS73733DCQR" IC_TPS73733DCQR 93.225,34.525 r180 top
U9 "ESP-12F(ESP8266MOD)" XCVR_ESP8266-12E/ESP-12E 80.725,58.725 r0 top
U10 "CH340G" SOIC127P600X180-16N 107.55,58.2 r180 top
U11 "USB3300-EZK" QFN32_5X5MC_MCH 86.286,14.819 r0 top value="32-QFN (5x5)"
X1 "CSTCE8M00G55-R0" MURA-CSTCE_G_A-3_V 82.075,30.798 r270 top
ZQ1 "Crystal" FP-ABS05-MFG 82.075,26.273 r90 top
ZQ2 "Crystal-1_3p" "SMD 3.2x2.5mm" 113.45,64.625 r270 top

## Footprints (in the part's own frame and the unit in brackets; to place one, negate y for a bottom-side part, rotate by r counter-clockwise, add the part's x,y. Pads: shape width x height; smd on the part's side, far side on the other; paste and mask are expansions set on the pad)
0603(LED) [mm]
  rect 0.8x0.8 smd: 1(0,0) 2(1.6,0)
  silkscreen extent -0.6,-0.6 2.4,0.6, body extent -0.13,-0.4 1.53,0.33, height 0.68
0603(LED_B) [mm]
  rect 0.8x0.8 smd: 1(0,0) 2(1.6,0)
  silkscreen extent -0.6,-0.6 2.4,0.6, body extent 0,-0.4 1.6,0.4, height 0.6
AMPHENOL_12402012E212A [mm]
  rect 0.6x1.14 smd: A1_B12(-3.2,4.75) A4_B9(-2.4,4.75) B1_A12(3.2,4.75) B4_A9(2.4,4.75)
  rect 0.3x1.14 smd: A5(-1.25,4.75) A6(-0.25,4.75) A7(0.25,4.75) A8(1.25,4.75) B5(1.75,4.75) B6(0.75,4.75) B7(-0.75,4.75) B8(-1.75,4.75)
  oval 1.05x2.1 hole 0.6 slot 1.7 at 90 deg: SH1(-4.32,4.18) SH2(4.32,4.18)
  oval 0.9x1.8 hole 0.6 slot 1.4 at 90 deg: SH3(-4.32,0) SH4(4.32,0)
  round 0.65 hole 0.65 unplated: ""(-2.89,3.68) ""(2.89,3.68)
  silkscreen extent -4.47,-2.6 4.47,2.81, body extent -4.47,-2.65 4.47,4.95, height 3.28
APSWPA6045 [mm]
  rect 1.7x5.7 smd: 1(-2.25,0) 2(2.25,0)
  silkscreen extent -4,0 0.75,1.9, body extent -3.15,-3 3.15,3, height 4.5
CAPC1005X55N [mm] "Chip Capacitor, Body 1.0x0.55mm, IPC Medium Density"
  rect 0.62x0.62 smd: 1(-0.45,0) 2(0.45,0)
  body extent -0.52,-0.27 0.53,0.28, height 0.55
CAPC1608X85N [mm] "Chip Capacitor, Body 1.6x0.8mm IPC Medium Density"
  rect 1x1 smd: 1(-0.75,0) 2(0.75,0)
  silkscreen extent 0,-0.5 0,0.5, body extent -0.87,-0.47 0.88,0.48, height 0.85
CAPC2012X135N [mm] "Chip Capacitor, Body 2.0x1.25mm, IPC Medium Density"
  rect 1.05x1.4 smd: 1(-0.9,0) 2(0.9,0)
  silkscreen extent 0,-0.7 0,0.7, body extent -1.05,-0.67 1.05,0.68, height 1.25
CAPPM7343X310N [mm]
  rect 2.31x2.52 smd: 1(-3.1,0) 2(3.1,0)
  silkscreen extent -5.18,-2.25 3.75,2.25, body extent -3.65,-2.15 3.65,2.15, height 3.1
CONN-TH_P5.00_KF301-5.0-2P [mm]
  round 2.2 hole 1.4: 1(-2.5,0) 2(2.5,0)
  silkscreen extent -5,-3.7 5.71,4, body extent -5.6,-3.65 5,3.95, height 10
DO-214AC [mm] "(SMA) Low profile package"
  rect 2x2 smd: 1(-2,0) 2(2,0)
  silkscreen extent -3.5,-1.5 3.5,1.5, body extent -2.6,-1.3 2.6,1.3, height 2.4
FP-ABS05-MFG [mm]
  rect 0.5x1 smd paste+0 mask+0: 1(-0.55,0) 2(0.55,0)
  silkscreen extent -0.85,-0.9 0.85,0.9, body extent -0.8,-0.5 0.8,0.5, height 0.5
FSMxJSMA-Series [mm] "Surface, Tactile Swith, 1 contact group, 0.05A 12V"
  rect 1.5x2.2 smd: 1(-2.25,4.5) 1(-2.25,-4.5) 2(2.25,4.5) 2(2.25,-4.5)
  silkscreen extent -3,-2.75 3,2.75, body extent -3,-4.5 3,4.5, height 5.01
IC_TPS73733DCQR [mm]
  rect 2.2x0.6 smd paste-0.025 mask+0.07: 1(-3.1,2.54) 2(-3.1,1.27) 3(-3.1,0) 4(-3.1,-1.27) 5(-3.1,-2.54)
  round 0.6 hole 0.5 mask+0: 6(1.5,2.25) 6(1.5,0.75) 6(1.5,-0.75) 6(1.5,-2.25) 6(3.1,2.25) 6(3.1,-2.25) 6(4.7,-2.25) 6(4.7,-0.75) 6(4.7,0.75) 6(4.7,2.25)
  rect 4x5.3 smd paste-0.925 mask-0.9: 6(3.1,0)
  silkscreen extent -3.6,-3.25 1.75,3.5, body extent -3.53,-3.25 3.53,3.25, height 1.8
LD-3mm-G [mm] "3mm DIP Green Led Footprint"
  round 1.6 hole 0.8: 1(-1.25,0) 2(1.25,0)
  silkscreen extent -2.25,-1.75 1.24,2, body extent -1.65,-1.69 1.65,1.6, height 7.01
LQFP100_L [mm] "Thin QFP, 100-Leads, Body 14x14mm, Pitch 0.5mm, IPC High Density"
  oval 1.55x0.25 smd: 1(-7.525,6) 2(-7.525,5.5) 3(-7.525,5) 4(-7.525,4.5) 5(-7.525,4) 6(-7.525,3.5) 7(-7.525,3) 8(-7.525,2.5) 9(-7.525,2) 10(-7.525,1.5) 11(-7.525,1) 12(-7.525,0.5) 13(-7.525,0) 14(-7.525,-0.5) 15(-7.525,-1) 16(-7.525,-1.5) 17(-7.525,-2) 18(-7.525,-2.5) 19(-7.525,-3) 20(-7.525,-3.5) 21(-7.525,-4) 22(-7.525,-4.5) 23(-7.525,-5) 24(-7.525,-5.5) 25(-7.525,-6) 51(7.525,-6) 52(7.525,-5.5) 53(7.525,-5) 54(7.525,-4.5) 55(7.525,-4) 56(7.525,-3.5) 57(7.525,-3) 58(7.525,-2.5) 59(7.525,-2) 60(7.525,-1.5) 61(7.525,-1) 62(7.525,-0.5) 63(7.525,0) 64(7.525,0.5) 65(7.525,1) 66(7.525,1.5) 67(7.525,2) 68(7.525,2.5) 69(7.525,3) 70(7.525,3.5) 71(7.525,4) 72(7.525,4.5) 73(7.525,5) 74(7.525,5.5) 75(7.525,6)
  oval 0.25x1.55 smd: 26(-6,-7.525) 27(-5.5,-7.525) 28(-5,-7.525) 29(-4.5,-7.525) 30(-4,-7.525) 31(-3.5,-7.525) 32(-3,-7.525) 33(-2.5,-7.525) 34(-2,-7.525) 35(-1.5,-7.525) 36(-1,-7.525) 37(-0.5,-7.525) 38(0,-7.525) 39(0.5,-7.525) 40(1,-7.525) 41(1.5,-7.525) 42(2,-7.525) 43(2.5,-7.525) 44(3,-7.525) 45(3.5,-7.525) 46(4,-7.525) 47(4.5,-7.525) 48(5,-7.525) 49(5.5,-7.525) 50(6,-7.525) 76(6,7.525) 77(5.5,7.525) 78(5,7.525) 79(4.5,7.525) 80(4,7.525) 81(3.5,7.525) 82(3,7.525) 83(2.5,7.525) 84(2,7.525) 85(1.5,7.525) 86(1,7.525) 87(0.5,7.525) 88(0,7.525) 89(-0.5,7.525) 90(-1,7.525) 91(-1.5,7.525) 92(-2,7.525) 93(-2.5,7.525) 94(-3,7.525) 95(-3.5,7.525) 96(-4,7.525) 97(-4.5,7.525) 98(-5,7.525) 99(-5.5,7.525) 100(-6,7.525)
  silkscreen extent -7.65,-6.35 6.35,6.8, body extent -7,-7 7,7, height 1.6
MURA-CSTCE_G_A-3_V [mm] "SMD, 3-Leads, Body 3.2x1.3mm, Pitch 1.2mm"
  rect 0.4x2 smd: 1(-1.2,0) 2(0,0) 3(1.2,0)
  silkscreen extent -2.07,-0.12 -1.83,0.13, body extent -1.6,-0.65 1.6,0.65, height 0.7
PLS-2 [mm]
  rect 2x2 hole 1.02: 1(1.4,1.3)
  round 2 hole 1.02: 2(3.94,1.3)
  silkscreen extent 0.08,0 5.2,3.5, body extent 0.1,0.06 5.18,2.6, height 8.54
PLS-3 [mm]
  rect 2x2 hole 1.02: 1(0,0)
  round 2 hole 1.02: 2(2.54,0) 3(5.08,0)
  silkscreen extent -1.32,-1.3 6.4,2.2, body extent -1.27,-1.24 6.35,1.3, height 8.54
PLS-5 [mm]
  rect 2x2 hole 1.02: 1(0,0)
  round 2 hole 1.02: 2(2.54,0) 3(5.08,0) 4(7.62,0) 5(10.16,0)
  silkscreen extent -1.32,-1.3 11.5,2.2, body extent -1.25,-1.3 11.45,1.24, height 8.54
QFN32_5X5MC_MCH [mil]
  rect 32x10 smd paste+0 mask+0: 1(-96.5,70) 2(-96.5,50) 3(-96.5,30) 4(-96.5,10) 5(-96.5,-10) 6(-96.5,-30) 7(-96.5,-50) 8(-96.5,-70) 17(96.5,-70) 18(96.5,-50) 19(96.5,-30) 20(96.5,-10) 21(96.5,10) 22(96.5,30) 23(96.5,50) 24(96.5,70)
  rect 10x32 smd paste+0 mask+0: 9(-70,-96.5) 10(-50,-96.5) 11(-30,-96.5) 12(-10,-96.5) 13(10,-96.5) 14(30,-96.5) 15(50,-96.5) 16(70,-96.5) 25(70,96.5) 26(50,96.5) 27(30,96.5) 28(10,96.5) 29(-10,96.5) 30(-30,96.5) 31(-50,96.5) 32(-70,96.5)
  rect 134x134 smd paste-66.5 mask-66.5: 33(0,0)
  silkscreen extent -102,-132 132,132, body extent -101,-101 101,101, height 65
QFN65P500X500X100-21N [mm]
  rrect25% 1.05x0.34 smd: 1(-2.36,1.3) 2(-2.36,0.65) 3(-2.36,0) 4(-2.36,-0.65) 5(-2.36,-1.3) 11(2.36,-1.3) 12(2.36,-0.65) 13(2.36,0) 14(2.36,0.65) 15(2.36,1.3)
  rrect25% 0.34x1.05 smd: 6(-1.3,-2.36) 7(-0.65,-2.36) 8(0,-2.36) 9(0.65,-2.36) 10(1.3,-2.36) 16(1.3,2.36) 17(0.65,2.36) 18(0,2.36) 19(-0.65,2.36) 20(-1.3,2.36)
  rect 3.15x3.15 smd paste-3: 21(0,0)
  silkscreen extent -3.58,-2.5 2.5,2.5, body extent -2.5,-2.5 2.5,2.5, height 1
QFP50P700X700X120-32N [mm]
  rrect25% 1.44x0.26 smd: 1(-3.195,1.75) 2(-3.195,1.25) 3(-3.195,0.75) 4(-3.195,0.25) 5(-3.195,-0.25) 6(-3.195,-0.75) 7(-3.195,-1.25) 8(-3.195,-1.75) 17(3.195,-1.75) 18(3.195,-1.25) 19(3.195,-0.75) 20(3.195,-0.25) 21(3.195,0.25) 22(3.195,0.75) 23(3.195,1.25) 24(3.195,1.75)
  rrect25% 0.26x1.44 smd: 9(-1.75,-3.195) 10(-1.25,-3.195) 11(-0.75,-3.195) 12(-0.25,-3.195) 13(0.25,-3.195) 14(0.75,-3.195) 15(1.25,-3.195) 16(1.75,-3.195) 25(1.75,3.195) 26(1.25,3.195) 27(0.75,3.195) 28(0.25,3.195) 29(-0.25,3.195) 30(-0.75,3.195) 31(-1.25,3.195) 32(-1.75,3.195)
  silkscreen extent -4.42,-2.53 2.53,2.53, body extent -3.5,-3.5 3.5,3.5, height 1.18
RESC1005X40N [mm] "Chip Resistor, EIA 0402, Metric 1005, Body 1.0x0.5mm, IPC Medium Density"
  rect 0.6x0.6 smd: 1(-0.45,0) 2(0.45,0)
  body extent -0.52,-0.27 0.53,0.28, height 0.4
RESC1608X50N [mm] "Chip Resistor, EIA 0603, Metric 1608, Body 1.6x0.8mm, IPC Medium Density"
  rect 0.72x0.99 smd: 1(-0.69,0) 2(0.69,0)
  body extent -0.87,-0.47 0.88,0.48, height 0.5
"SMD 3.2x2.5mm" [mm]
  rect 1.4x1.2 smd paste+0: 1(-1.1,-0.85) 2(1.1,-0.85) 3(1.1,0.85) 4(-1.1,0.85)
  silkscreen extent -1.92,-2.22 1.3,1.8, body extent -1.6,-1.25 1.6,1.25, height 0.77
SOIC127P600X180-16N [mm]
  rrect25% 1.31x0.62 smd: 1(-2.75,4.445) 2(-2.75,3.175) 3(-2.75,1.905) 4(-2.75,0.635) 5(-2.75,-0.635) 6(-2.75,-1.905) 7(-2.75,-3.175) 8(-2.75,-4.445) 9(2.75,-4.445) 10(2.75,-3.175) 11(2.75,-1.905) 12(2.75,-0.635) 13(2.75,0.635) 14(2.75,1.905) 15(2.75,3.175) 16(2.75,4.445)
  silkscreen extent -2.85,-5 1.78,5.85, body extent -3,-5 3,5, height 1.8
SOP65P490X110-8N_2 [mm]
  rrect25% 1.47x0.48 smd: 1(-2.15,0.975) 2(-2.15,0.325) 3(-2.15,-0.325) 4(-2.15,-0.975) 5(2.15,-0.975) 6(2.15,-0.325) 7(2.15,0.325) 8(2.15,0.975)
  silkscreen extent -3.62,-1.54 1.5,1.54
SOT95P240X130-3N [mm] "SOT23 3-Leads, Pitch 0.95mm - Body 1.3x2.9mm, IPC Medium Density"
  rect 1.05x0.65 smd: 1(-1.15,0.95) 2(-1.15,-0.95) 3(1.15,0)
  silkscreen extent -1.53,-1.45 0.3,1.92, body extent -1.25,-1.5 1.25,1.5, height 1.3
SOT230P700-4BN [mm] "SOT223, 4-Leads, Body 6.5x3.5mm, Pitch 2.3mm, Lead Span 7mm, IPC Medium Density"
  rect 2.2x1 smd: 1(-3,2.3) 2(-3,0) 3(-3,-2.3)
  rect 2.2x3.3 smd: 4(3,0)
  silkscreen extent -3.12,-3.35 1.6,3.47, body extent -1.85,-3.35 1.85,3.35, height 1.8
TO-263-3_L8.6-W10.2-P2.54-LS14.4-BR [mm]
  rect 3.3x1.511 smd: 1(4.952,-2.54) 2(4.952,0) 3(4.952,2.54)
  rect 10.02x10.122 smd: 4(-4.952,0)
  silkscreen extent 0.46,-5 3.06,5, body extent -9.52,-5 6.15,5, height 4.83
U254-051T-4BH81-S1S [mm]
  oval 1.2x1.9 hole 0.6 slot 1.3 at 90 deg: 0(-3.5,-2.7) 0(3.5,-2.7)
  rect 2.1x1.6 smd: 0(-3.1,-0.125) 0(3.1,-0.125)
  rect 1.9x1.9 smd: 0(-1.2,-2.7) 0(1.2,-2.7)
  rect 0.4x1.35 smd: 1(-1.3,0) 2(-0.65,0) 3(0,0) 4(0.65,0) 5(1.3,0)
  body extent -4.07,-5.29 4.13,0.14, height 2.73
WSON10 [mm]
  rect 0.85x0.28 smd: 1(-1.475,1) 2(-1.475,0.5) 3(-1.475,0) 4(-1.475,-0.5) 5(-1.475,-1) 6(1.475,-1) 7(1.475,-0.5) 8(1.475,0) 9(1.475,0.5) 10(1.475,1)
  rect 0.25x0.7 smd mask+0: 11(-0.6,1.425) 11(-0.6,-1.425) 11(-0.2,1.425) 11(-0.2,-1.425) 11(0.2,1.425) 11(0.2,-1.425) 11(0.6,1.425) 11(0.6,-1.425)
  round 0.7 hole 0.3 mask+0.102: 11(-0.5,-0.5) 11(-0.5,0.5) 11(0,0) 11(0.5,-0.5) 11(0.5,0.5)
  rect 1.7x2.15 smd paste-2 mask+0: 11(0,0)
  Top Layer region: 0.725,1.075 0.85,1.075 0.85,-1.075 0.725,-1.075 0.725,-1.775 0.475,-1.775 0.475,-1.075 0.325,-1.075 0.325,-1.775 0.075,-1.775 0.075,-1.075 -0.075,-1.075 -0.075,-1.775 -0.325,-1.775 -0.325,-1.075 -0.475,-1.075 -0.475,-1.775 -0.725,-1.775 -0.725,-1.075 -0.85,-1.075 -0.85,1.075 -0.725,1.075 -0.725,1.775 -0.475,1.775 -0.475,1.075 -0.325,1.075 -0.325,1.775 -0.075,1.775 -0.075,1.075 0.075,1.075 0.075,1.775 0.325,1.775 0.325,1.075 0.475,1.075 0.475,1.775 0.725,1.775
  silkscreen extent -2.45,-1.58 1.58,1.58, body extent -1.5,-1.5 1.5,1.5, height 0.8
XCVR_ESP8266-12E/ESP-12E [mm]
  rect 2x1.2 smd: 1(-7.5,7) 2(-7.5,5) 3(-7.5,3) 4(-7.5,1) 5(-7.5,-1) 6(-7.5,-3) 7(-7.5,-5) 8(-7.5,-7) 15(7.5,-7) 16(7.5,-5) 17(7.5,-3) 18(7.5,-1) 19(7.5,1) 20(7.5,3) 21(7.5,5) 22(7.5,7)
  rect 1.1x1.7 smd: 9(-5,-8.5) 10(-3,-8.5) 11(-1,-8.5) 12(1,-8.5) 13(3,-8.5) 14(5,-8.5)
  Keep-Out Layer region: 8,8.51 -8.009,8.51 -8.009,15.5 8,15.5
  Keep-Out Layer region: 8,8.51 -8.009,8.51 -8.009,15.5 8,15.5
  silkscreen extent -9.5,-8.5 8,15.5, body extent -8,-8.51 8,15.49, height 3
XH2.54-2PZZ [mm]
  rect 2x2 hole 1: 1(-1.27,0)
  round 2 hole 1: 2(1.27,0)
  silkscreen extent -5.25,-3.7 3.7,2.2, body extent -3.7,-3.6 3.7,2.2, height 7
XH2.54-5PZZ [mm]
  rect 2x2 hole 1: 1(-5.08,0)
  round 2 hole 1: 2(-2.54,0) 3(0,0) 4(2.54,0) 5(5.08,0)
  silkscreen extent -8.75,-3.7 7.52,2.5, body extent -7.52,-3.4 7.52,2.4, height 7

## Part data
C1A C1B C1C C10A C10B C10C C11A C11B C11C C39 C67 C72 C73: library part CC0603KRX7R9BB105, "CAP CER 0603 1u 50V X7R", Dielectric Type=X7R, Manufacturer=Yageo, Tolerance=10%, Voltage=50V, Working Temperature Max=+125°С, Working Temperature Min=-55°С, Author="Krepak V.", CreateDate=06.04.2020, Datasheet URL=#https://www.terraelectronica.ru/pdf/show?pdf_file=http%253A%252F%252Fwww.mouser.com%252Fds%252F2%252F447%252FUPY-GPHC_X7R_6.3V-to-50V_18-1154002.pdf#, Device=0603, ID=12, Manufacturer Part Number=CC0603KRX7R9BB105, Packaging Type="Cut Tape", Part Number=CC0603KRX7R9BB105, Price=0, Price2=0, Price3=0, Series=CC, SMD=Yes, Status=Active, Table="Capacitor SMT - Керамические", Type=Resistor
C2A C2B C2C C3A C3B C3C C4A C4B C4C: library part CL05B104KO5NNNC, "CAP CER 0402 0.1u 16V X7R", Dielectric Type=X7R, Manufacturer="Samsung Electro-Mechanics", Supplier Part Number 1=1276-1001-2-ND, Tolerance=10%, Voltage=16V, Working Temperature Max=+125°С, Working Temperature Min=-55°С, Author="Krepak V.", CreateDate=22.06.2021, Datasheet URL=#https://media.digikey.com/pdf/Data%20Sheets/Samsung%20PDFs/CL05B104KO5NNNC.pdf#, Device=0402, ID=57, Manufacturer Part Number=CL05B104KO5NNNC, Packaging Type=Tape&Reel, Part Number=CL05B104KO5NNNC, Price=0, Price2=0, Price3=0, Series=CL, SMD=Yes, Status=Active, Supplier 1=Digikey, Table="Capacitor SMT - Керамические", Type=Resistor
C5A C5B C5C C6A C6B C6C: library part C1608X7R1H334K080AC, "CAP CER 0603 330n 50V X7R", Dielectric Type=X7R, Manufacturer=Yageo, Tolerance=10%, Voltage=50V, Working Temperature Max=+125°С, Working Temperature Min=-55°С, Author="Krepak V.", CreateDate=06.07.2020, Datasheet URL=#https://www.terraelectronica.ru/pdf/show?pdf_file=http%253A%252F%252Fwww.farnell.com%252Fdatasheets%252F1913358.pdf#, Device=0603, ID=16, Manufacturer Part Number=C1608X7R1H334K080AC, Packaging Type="Cut Tape", Part Number=C1608X7R1H334K080AC, Price=0, Price2=0, Price3=0, Series=C, SMD=Yes, Status=Active, Table="Capacitor SMT - Керамические", Type=Resistor
C13A C13B C13C: library part GRM21BR61E106KA73L, "CAP CER 0805 10uF 25V X5R", Dielectric Type=X5R, Manufacturer=Murata, Tolerance=10%, Voltage=25V, Working Temperature Max=+125°С, Working Temperature Min=-55°С, Author="Arshanitsa D.", CreateDate=17.08.2020, Datasheet URL=#https://www.terraelectronica.ru/pdf/show?pdf_file=http%253A%252F%252Fwww.farnell.com%252Fdatasheets%252F2047963.pdf#, Device=0805, ID=20, Manufacturer Part Number=GRM21BR61E106KA73L, Packaging Type="Cut Tape", Part Number=GRM21BR61E106KA73L, Price=0, Price2=0, Price3=0, Series=GRM, SMD=Yes, Status=Active, Table="Capacitor SMT - Керамические", Type=Resistor
C17A C17B C17C C19A C19B C19C C55A C55B C55C C59A C59B C59C: library part CC0402JRX7R9BB471, "CAP CER 0402 470p 50V X7R", Dielectric Type=X7R, Manufacturer=Yageo, Tolerance=5%, Voltage=50V, Working Temperature Max=+125°С, Working Temperature Min=-55°С, Author="Krepak V.", CreateDate=05.04.2020, Datasheet URL=#https://www.terraelectronica.ru/pdf/show?pdf_file=%252Fds%252Fpdf%252FX%252FX7R_16V-to-100V.pdf#, Device=0402, ID=11, Manufacturer Part Number=CC0402JRX7R9BB471, Packaging Type="Cut Tape", Part Number=CC0402JRX7R9BB471, Price=0, Price2=0, Price3=0, Series=CC, SMD=Yes, Status=Active, Table="Capacitor SMT - Керамические", Type=Resistor
C18A C18B C18C C57A C57B C57C: library part CC0402KRX7R9BB472, "CAP CER 0402 4700pF 50V X7R", Dielectric Type=X7R, Manufacturer=Yageo, Tolerance=±10%, Voltage=50V, Working Temperature Max=+125°С, Working Temperature Min=-55°С, Author="Krepak V.", CreateDate=09.04.2024, Device=0402, ID=70, Manufacturer Part Number=CC0402KRX7R9BB472, Packaging Type=Tape&Reel, Part Number=CC0402KRX7R9BB472, Price=0, Price2=0, Price3=0, Series=CC, SMD=Yes, Status=Active, Table="Capacitor SMT - Керамические", Type=Resistor
C25 C26 C27 C28 C29 C30 C31 C32 C33 C40 C43 C44 C51 C62 C64 C68: library part GRM155R71E104KE14D, "CAP CER 0402 100n 25V X7R", Dielectric Type=X7R, Manufacturer=Murata, Tolerance=10%, Voltage=25V, Working Temperature Max=+125°С, Working Temperature Min=-55°С, Author="Krepak V.", CreateDate=23.02.2020, Device=0402, ID=4, Manufacturer Part Number=GRM155R71E104KE14D, Packaging Type="Cut Tape", Part Number=GRM155R71E104KE14D, Price=0, Price2=0, Price3=0, Series=GRM, SMD=Yes, Status=Active, Table="Capacitor SMT - Керамические", Type=Resistor
C34 C35: library part GRM155R61A225KE95D, "CAP CER 0402 2.2uF 10V X5R", Dielectric Type=X5R, Manufacturer=Murata, Tolerance=10%, Voltage=10V, Working Temperature Max=+85°С, Working Temperature Min=-55°С, Author="Krepak V.", CreateDate=31.03.2021, Datasheet URL=#https://search.murata.co.jp/Ceramy/image/img/A01X/G101/ENG/GRM155R61A225KE95-01.pdf#, Device=0402, ID=36, Manufacturer Part Number=GRM155R61A225KE95D, Packaging Type="Cut Tape", Part Number=GRM155R61A225KE95D, Price=0, Price2=0, Price3=0, Series=GRM, SMD=Yes, Status=Active, Table="Capacitor SMT - Керамические", Type=Resistor
C36 C37: library part GRM1555C1H120JA01D, "CAP CER 0402 12pF 50V NP0", Dielectric Type=NP0, Manufacturer=Murata, Supplier Part Number 1=490-5924-2-ND, Tolerance=5%, Voltage=50V, Working Temperature Max=+125°С, Working Temperature Min=-55°С, Author="Krepak V.", CreateDate=22.04.2021, Datasheet URL=#https://search.murata.co.jp/Ceramy/image/img/A01X/G101/ENG/GRM1555C1H120JA01-01.pdf#, Device=0402, ID=49, Manufacturer Part Number=GRM1555C1H120JA01D, Packaging Type=Tape&Reel, Part Number=GRM1555C1H120JA01D, Price=0, Price2=0, Price3=0, Series=GRM, SMD=Yes, Status="Not recommended", Supplier 1=Digikey, Table="Capacitor SMT - Керамические", Type=Resistor
C38 C41 C42 C45 C46 C47 C48 C53 C69 C70: library part GRM21BR61E226ME44L, "CAP CER 0805 22uF 25V X5R", Dielectric Type=X5R, Manufacturer=Murata, Tolerance=20%, Voltage=25V, Working Temperature Max=+125°С, Working Temperature Min=-55°С, Author="Arshanitsa D.", CreateDate=17.08.2020, Datasheet URL=#https://www.terraelectronica.ru/pdf/show?pdf_file=http%253A%252F%252Fwww.farnell.com%252Fdatasheets%252F2048737.pdf#, Device=0805, ID=21, Manufacturer Part Number=GRM21BR61E226ME44L, Packaging Type="Cut Tape", Part Number=GRM21BR61E226ME44L, Price=0, Price2=0, Price3=0, Series=GRM, SMD=Yes, Status=Active, Table="Capacitor SMT - Керамические", Type=Resistor
C49 C50 C63: library part GRM21BZ71E106KE15L, "CAP CER 0805 10u 25V X7R", Dielectric Type=X7R, Manufacturer=Murata, Tolerance=10%, Voltage=25V, Working Temperature Max=+125°С, Working Temperature Min=-55°С, Author="Krepak V.", CreateDate=23.02.2020, Device=0805, ID=5, Manufacturer Part Number=GRM21BZ71E106KE15L, Packaging Type="Cut Tape", Part Number=GRM21BZ71E106KE15L, Price=0, Price2=0, Price3=0, Series=GRM, SMD=Yes, Status=Active, Table="Capacitor SMT - Керамические", Type=Resistor
C52: library part CC0402JRNPO9BN100, "CAP CER 0402 10pF 50V NP0", Dielectric Type=NP0, Manufacturer=Yageo, Supplier Part Number 1=311-1014-2-ND, Tolerance=5%, Voltage=50V, Working Temperature Max=+125°С, Working Temperature Min=-55°С, Author="Krepak V.", CreateDate=22.06.2021, Datasheet URL=#https://www.yageo.com/upload/media/product/productsearch/datasheet/mlcc/UPY-GP_NP0_16V-to-50V_18.pdf#, Device=0402, ID=55, Manufacturer Part Number=CC0402JRNPO9BN100, Packaging Type=Tape&Reel, Part Number=CC0402JRNPO9BN100, Price=0, Price2=0, Price3=0, Series=CC, SMD=Yes, Status="Not recommended", Supplier 1=Digikey, Table="Capacitor SMT - Керамические", Type=Resistor
C60: library part T491D106K035AT, "CAP TANT T491D106K035AT 10uF 35V Tantalum", Dielectric Type=Tantalum, Manufacturer=KEMET, Tolerance=±10%, Voltage=35V, Working Temperature Max=+125°C, Working Temperature Min=-55°C, Author="Krepak V.", CreateDate=20.02.2024, Datasheet URL=#https://datasheet.lcsc.com/lcsc/2304140030_KEMET-T491D106K035AT_C122299.pdf#, Device=T491D106K035AT, ID=2, Manufacturer Part Number=T491D106K035AT, Packaging Type="Cut Tape", Part Number=T491D106K035AT, Price=0, Price2=0, Price3=0, Series=T491, SMD=Yes, Status=Active, Table="Capacitor SMT - Электролитические", Type=Resistor
C61: library part GRM155R71C104KA88D, "CAP CER 0402 100n 16V X7R", Dielectric Type=X7R, Manufacturer=Murata, Tolerance=10%, Voltage=16V, Working Temperature Max=+125°С, Working Temperature Min=-55°С, Author="Krepak V.", CreateDate=23.02.2020, Device=0402, ID=3, Manufacturer Part Number=GRM155R71C104KA88D, Packaging Type="Cut Tape", Part Number=GRM155R71C104KA88D, Price=0, Price2=0, Price3=0, Series=GRM, SMD=Yes, Status=Active, Table="Capacitor SMT - Керамические", Type=Resistor
C65 C66: library part C0402C180K5RACTU, "CAP CER 0402 18p 50V X7R", Dielectric Type=X7R, Manufacturer=Kemet, Manufacturer Part Number=C0402C180K5RAC7867, Tolerance=10%, Voltage=50V, Working Temperature Max=+125°С, Working Temperature Min=-55°С, Author="Krepak V.", CreateDate=25.02.2020, Device=0402, ID=9, Packaging Type="Cut Tape", Part Number=C0402C180K5RACTU, Price=0, Price2=0, Price3=0, Series="C Series KEMET", SMD=Yes, Status=Active, Table="Capacitor SMT - Керамические", Type=Resistor
C71: library part CC0402KRX7R8BB103, "CAP CER 0402 0.01uF 25V X7R", Dielectric Type=X7R, Manufacturer=Yageo, Supplier Part Number 1=311-1337-2-ND, Tolerance=±10%, Voltage=25V, Working Temperature Max=+125°С, Working Temperature Min=-55°С, Author="Krepak V.", CreateDate=24.06.2021, Datasheet URL=#https://www.yageo.com/upload/media/product/productsearch/datasheet/mlcc/UPY-GPHC_X7R_6.3V-to-50V_18.pdf#, Device=0402, ID=65, Manufacturer Part Number=CC0402KRX7R8BB103, Packaging Type=Tape&Reel, Part Number=CC0402KRX7R8BB103, Price=0, Price2=0, Price3=0, Series=CC, SMD=Yes, Status=Active, Supplier 1=Digikey, Table="Capacitor SMT - Керамические", Type=Resistor
C74: library part C1005C0G1H102JT000F, "CAP CER 0402 1nF 50V NP0", Dielectric Type=NP0, Manufacturer="TDK Corporation", Tolerance=5%, Voltage=50V, Working Temperature Max=+125°С, Working Temperature Min=-55°С, Author="Krepak V.", CreateDate=19.02.2024, Device=0402, ID=67, Manufacturer Part Number=C1005C0G1H102JT000F, Packaging Type=Tape&Reel, Part Number=C1005C0G1H102JT000F, Price=0, Price2=0, Price3=0, SMD=Yes, Status=Active, Table="Capacitor SMT - Керамические", Type=Resistor
D3 D4: "DIODE SMA4007", Average Current=1A, Capacitance="15pF @ 4V, 1MHz", Forward Voltage="1.1V @ 1.0A DC", Manufacturer="Wing Shing", Max Reverse Voltage=1000VDC, Peak Pulse Current=30A, Reverse Leakage Current="5uA @ 25°С 1000V", Working Temperature Max="+165°С (JT)", Working Temperature Min=-65°С, Author="Krepak V.", ComponentHeight=0.96mm, CreateDate=24.06.2020, Datasheet URL=#http://pdf.datasheet.live/c12a47ed/wingshing.com/SMA4007.pdf#, Device=SMA4007, Distributor=Chipdip, DistributorURL=#https://www.chipdip.ru/product/sma4007#, ID=1, LatestRevisionDate=24.06.2020, Manufacturer Part Number=SMA4007, Packaging Type="Cut Tape", Part Number=SMA4007, Price=0, Price2=0, Price3=0, Replacement="1N4007FLTR, M7, S1MB-13", Reverse Recovery Time=2.5µs, SMD=Yes, Speed="Standard Recovery", Status=Active, Table="Diodes SMT - Общ", Type=Diode
J1 J6: "1x2P XH 1 2.54mm Tin Male pin 2 260℃ -25℃~+85℃ Brass 3A Straight Plugin,P=2.54mm Wire To Board / Wire To Wire Connector ROHS", Author="Krepak V.", CreateDate=19.02.2024, Device=ZX-XH2.54-2PZZ, ID=48, Part Number=ZX-XH2.54-2PZZ, Price=0, Price2=0, Price3=0, SMD=No, Status=Active, Table="Connectors - Общ", Type=Connector
J2 J8A J8B J8C J11A J11B J11C J12A J12B J12C J19: Limit Voltage="500 V AC(1 min)", Manufacturer=CONNFLY, Resistance="20 mOhm(max)", Working Temperature Max=+70°С, Working Temperature Min=-20°С, Author="Arshanitsa D.", CreateDate=19.08.2020, Datasheet URL=#https://static.chipdip.ru/lib/227/DOC000227157.pdf#, Pitch=2.54mm, Price=0, Price2=0, Price3=0, SMD=No, Status=Active, Table="Connectors - Общ", Type=Connector
  J2 J8A J8B J8C J11A J11B J11C J19: Device=PLS-3, ID=13, Part Number=DS1021-1*3SF11-B, Pins=3
  J12A J12B J12C: Device=PLS-2, ID=14, Part Number=DS1021-1*2SF11-B, Pins=2
J3A J3B J3C: "1x5P XH 1 2.54mm Tin Male pin 5 260℃ -25℃~+85℃ Brass 3A Straight Plugin,P=2.54mm Wire To Board / Wire To Wire Connector ROHS", Author="Krepak V.", CreateDate=09.04.2024, Device=ZX-XH2.54-5PZZ, ID=50, Part Number=ZX-XH2.54-5PZZ, Price=0, Price2=0, Price3=0, SMD=No, Status=Active, Table="Connectors - Общ", Type=Connector
J4 J17: Limit Voltage="500 V AC (1 min)", Manufacturer=CONNFLY, Resistance="20 mOhm(max)", Working Temperature Max=+70°С, Working Temperature Min=-20, Author="Arshanitsa D.", CreateDate=09.06.2020, Datasheet URL=#https://static.chipdip.ru/lib/227/DOC000227157.pdf#, Device=PLS-5, ID=12, Part Number=DS1021-1*5SF11-B, Pins=5, Pitch=2.54mm, Price=0, Price2=0, Price3=0, SMD=No, Status=Active, Table="Connectors - Общ", Type=Connector
J5: "1 16P -25℃~+85℃ Type-C SMD USB, DVI, HDMI Connector Assemblies RoHS", Package=None, Availability="In Stock", Check_prices=https://www.snapeda.com/parts/12402012E212A/Amphenol/view-part/?ref=eda, Device=USB-TYPE-C-019, ID=36, MF="Amphenol ICC (Commercial Products)", MP=12402012E212A, Part Number=USB-TYPE-C-019, Pins=16+8, Price=0, Price2=0, Price3=0, Purchase-URL=https://pricing.snapeda.com/search/part/12402012E212A/?ref=eda, SnapEDA_Link=https://www.snapeda.com/parts/12402012E212A/Amphenol/view-part/?ref=snap, Table="Connectors - Интерфейсы", Type=Connector
J9A J9B J9C J10A J10B J10C: "1x2P -30℃~+120℃ 17A 250V Blue 14~22 Straight 5mm 1.5 1 2 Plugin,P=5mm Screw terminal ROHS", Limit Current=17A, Limit Voltage=250V, Manufacturer="Cixi Kefa Elec", Working Temperature Max=+120°С, Working Temperature Min=-30°С, Author="Krepak V.", CreateDate=19.02.2024, Datasheet URL=#https://jlcpcb.com/partdetail/Cixi_KefaElec-KF301_5_02P/C474881#, Device=KF301-5.0-2P, ID=47, Part Number=KF301-5.0-2P, Price=0, Price2=0, Price3=0, SMD=No, Status=Active, Table="Connectors - Общ", Type=Connector
J18: "USB 2.0 1.8A 1 260℃ Surface Mount，Right Angle 5P Female -40℃~+85℃ Gold Copper Alloy Micro-B SMD USB Connectors ROHS", Author="Krepak V.", CreateDate=09.04.2024, Device=U254-051T-4BH81-S1S, ID=34, Part Number=U254-051T-4BH81-S1S, Price=0, Price2=0, Price3=0, Series=U254-051T-4BH81-S1S, Table="Connectors - Интерфейсы", Type=Connector
L1: library part APSWPA6045S1R0NTF, "IND APSWPA6045S1R0NTF 1uH ±30%", DC Resistance="14mOhm Max", Inductor Type=Wirewound, Manufacturer=APV, Rated Current=5,6A, Tolerance=±30%, Working Temperature Max=+125°C, Working Temperature Min=-40°C, Author="Krepak V.", CreateDate=22.02.2024, Datasheet URL=#https://jlcpcb.com/partdetail/Apv-APSWPA6045S1R0NTF/C5363709#, Datasheet Version=2023/03/10, Device=APSWPA6045S1R0NTF, ID=16, Manufacturer Part Number=APSWPA6045S1R0NTF, Packaging Type=Tape&Reel, Part Number=APSWPA6045S1R0NTF, Price=0, Price2=0, Price3=0, Self Resonant=100MHz, Series=APSWPA, SMD=Yes, Status=Active, Table="Inductors SMT - Общ", Type=Inductor
LD1 LD2 LD3: library part LTST-C191TBKT-5A, "DIODE LTST-C191TBKT-5A", Author="Krepak V.", Color=Blue, CreateDate=18.02.2024, Datasheet URL=#https://jlcpcb.com/partdetail/liteon-LTST_C191TBKT5A/C161620#, Device=LTST-C191TBKT-5A, ID=9, Manufacturer Part Number=LTST-C191TBKT-5A, Packaging Type="Cut Tape", Part Number=LTST-C191TBKT-5A, Price=0, Price2=0, Price3=0, SMD=Yes, Status=Active, Table="Diodes SMT - Светодиоды", Type=Diode
LD4: library part TO-1608BC-BF, "DIODE TO-1608BC-BF", Manufacturer Part Number=9201T055, Author="Arshanitsa D.", Color=Blue, CreateDate=28.06.2020, Datasheet URL=#https://static.chipdip.ru/lib/736/DOC002736042.pdf#, Device=TO-1608BC-BF, ID=1, Packaging Type="Cut Tape", Part Number=TO-1608BC-BF, Price=0, Price2=0, Price3=0, SMD=Yes, Table="Diodes SMT - Светодиоды", Type=Diode